# Altium PCB Sampler_4HP.PCBDOC (part 1 of 6)
Units mm, origin at the board's own origin, x right, y up, seen from the top; angles counter-clockwise.
Board outline 159.99 x 100 mm, 4 copper layers (Top, GP1(GND), L3, Bot), stack 1.648 mm thick; 546 components, 321 nets, 1657 pads, 795 vias.
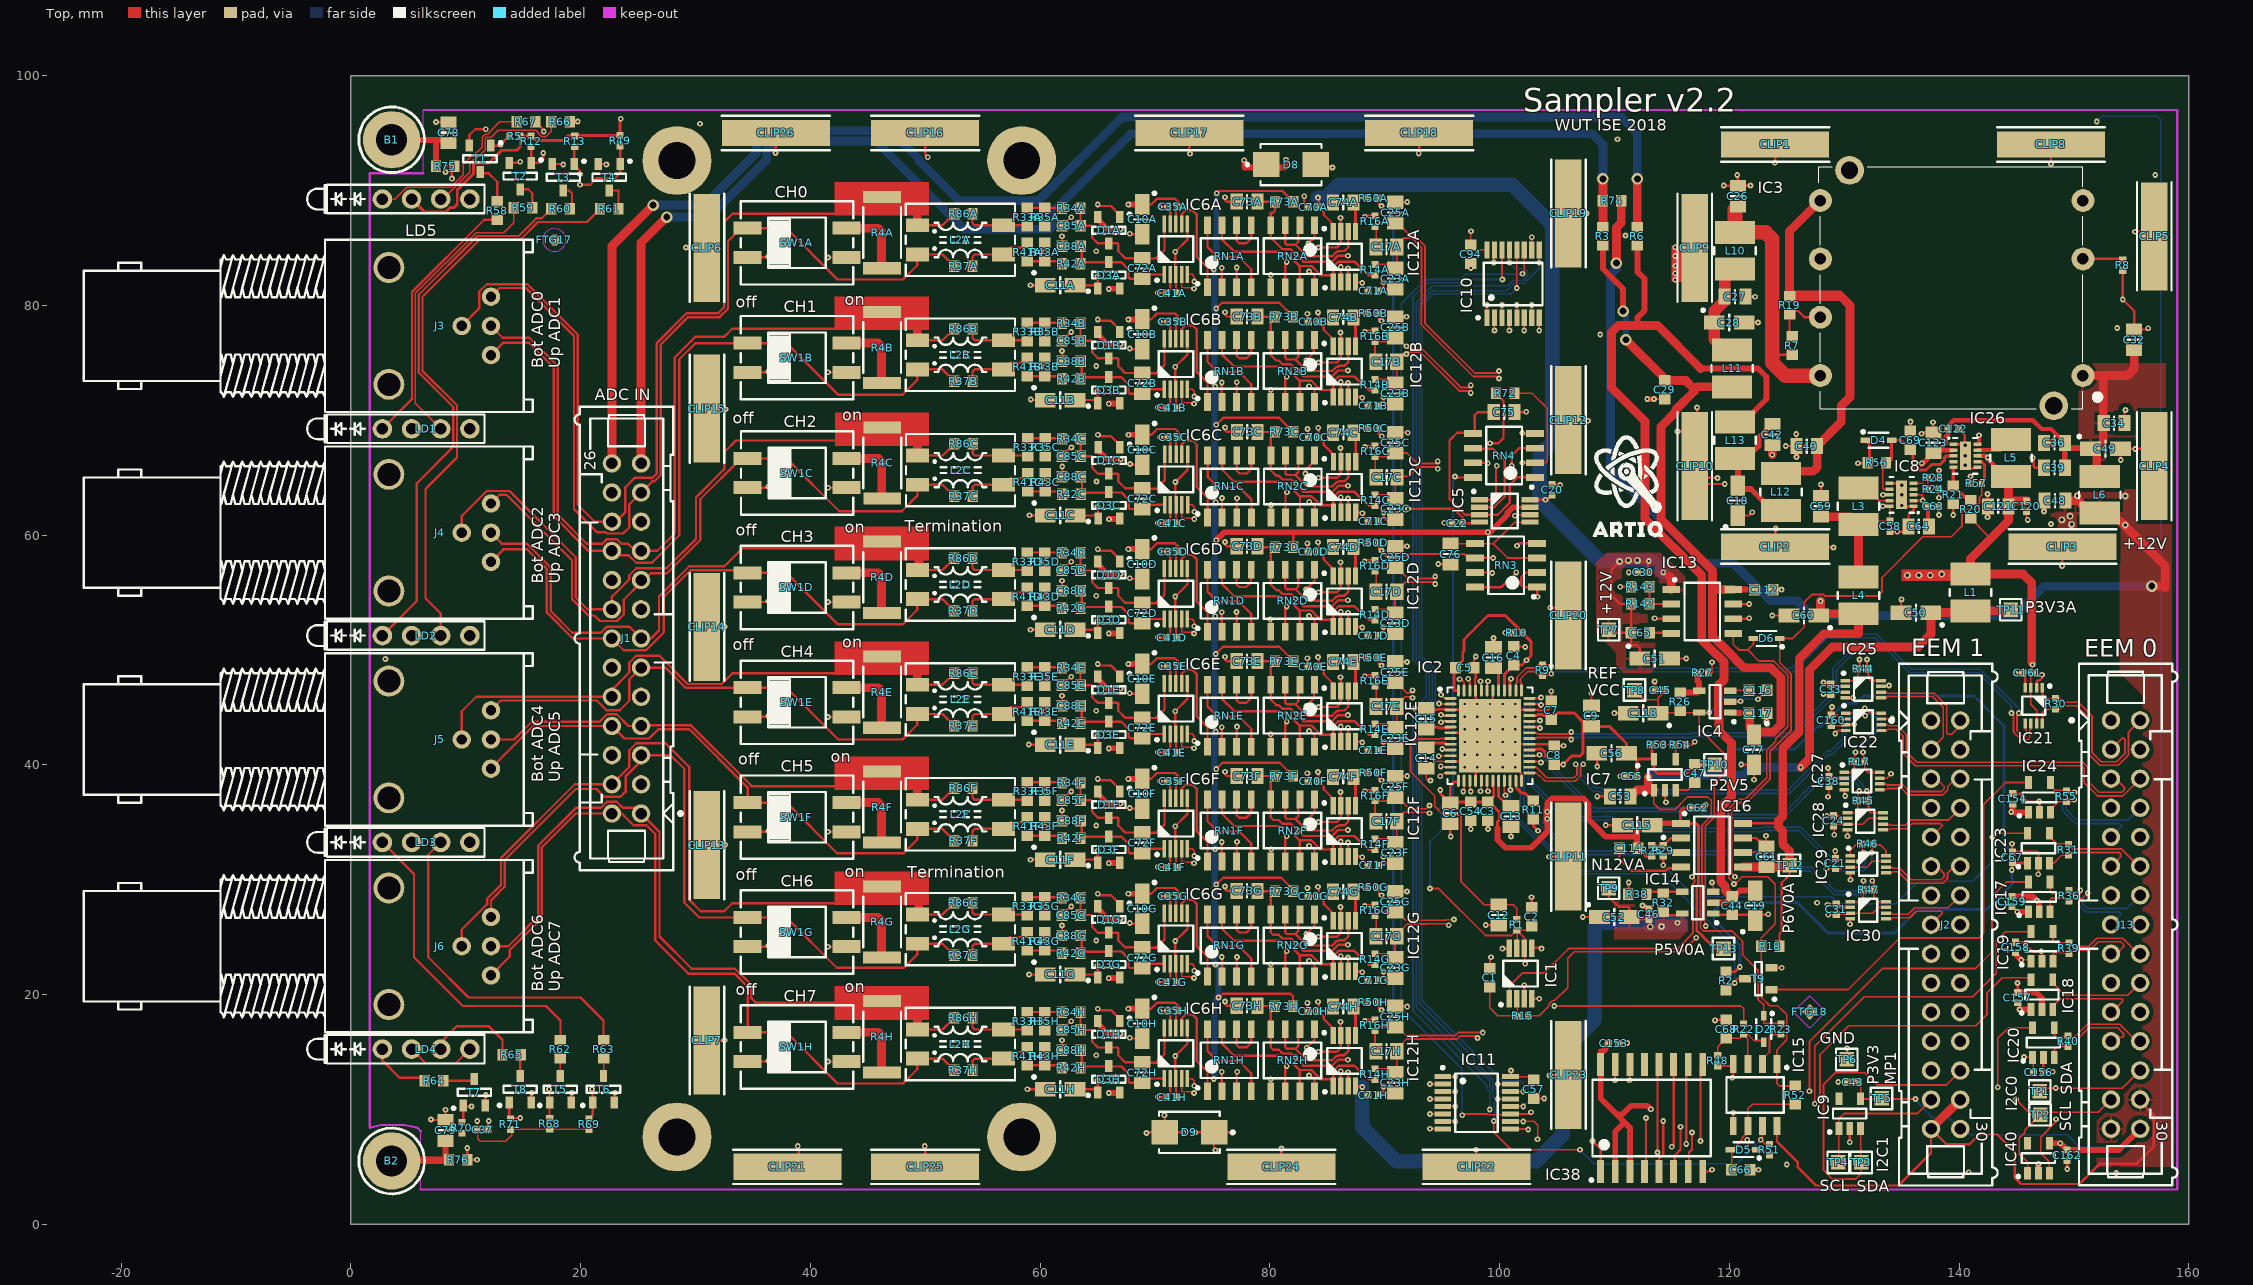
[diagram p0: Top view]
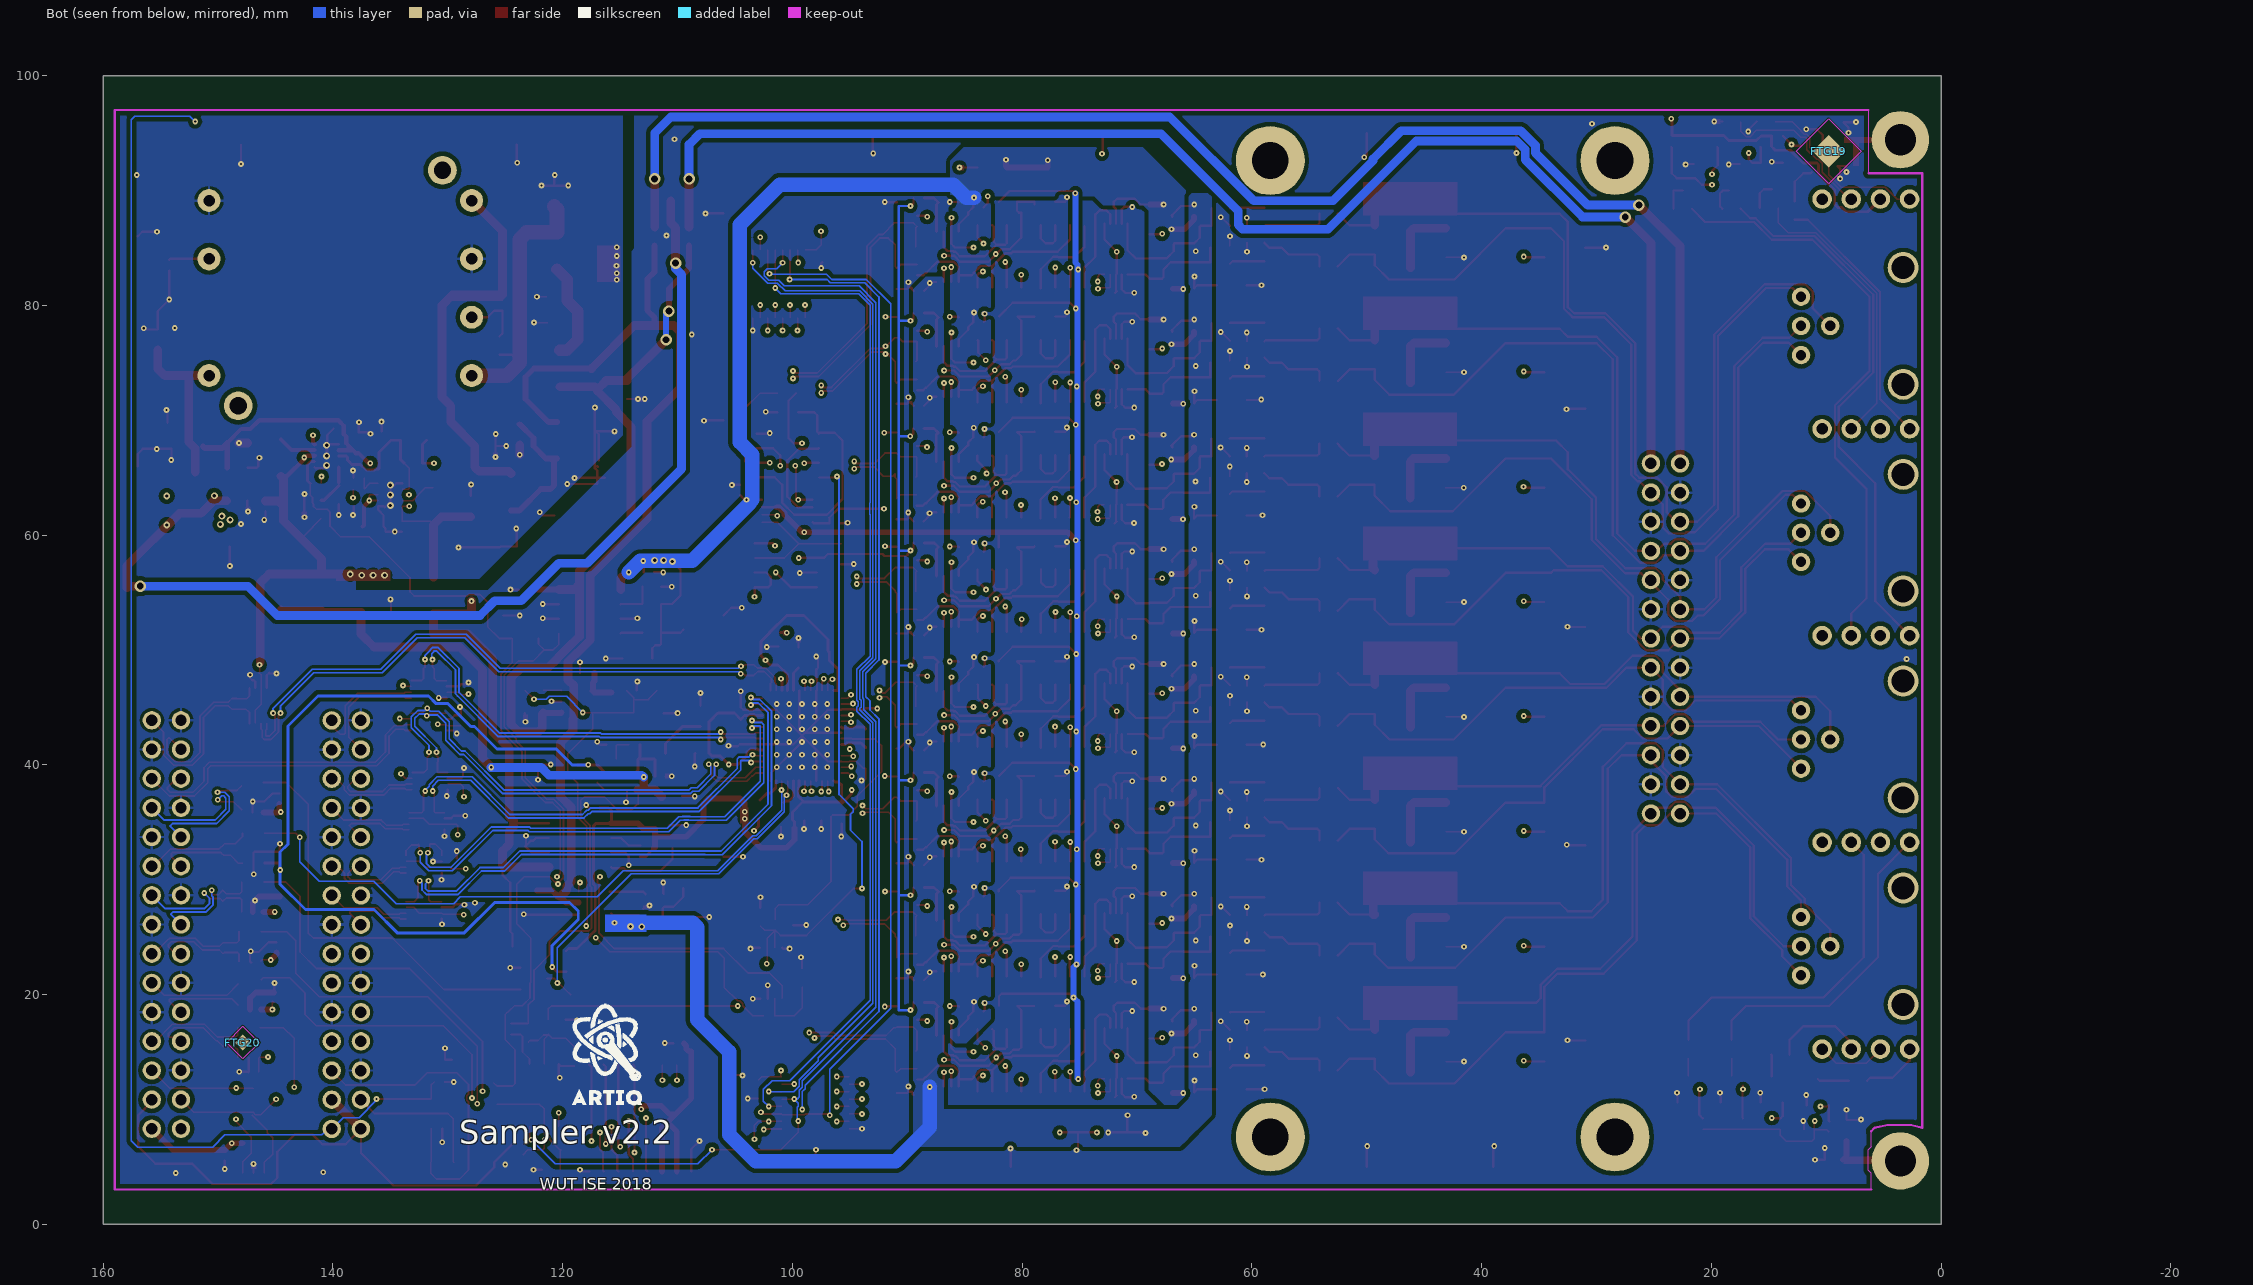
[diagram p1: Bot view, seen from below]
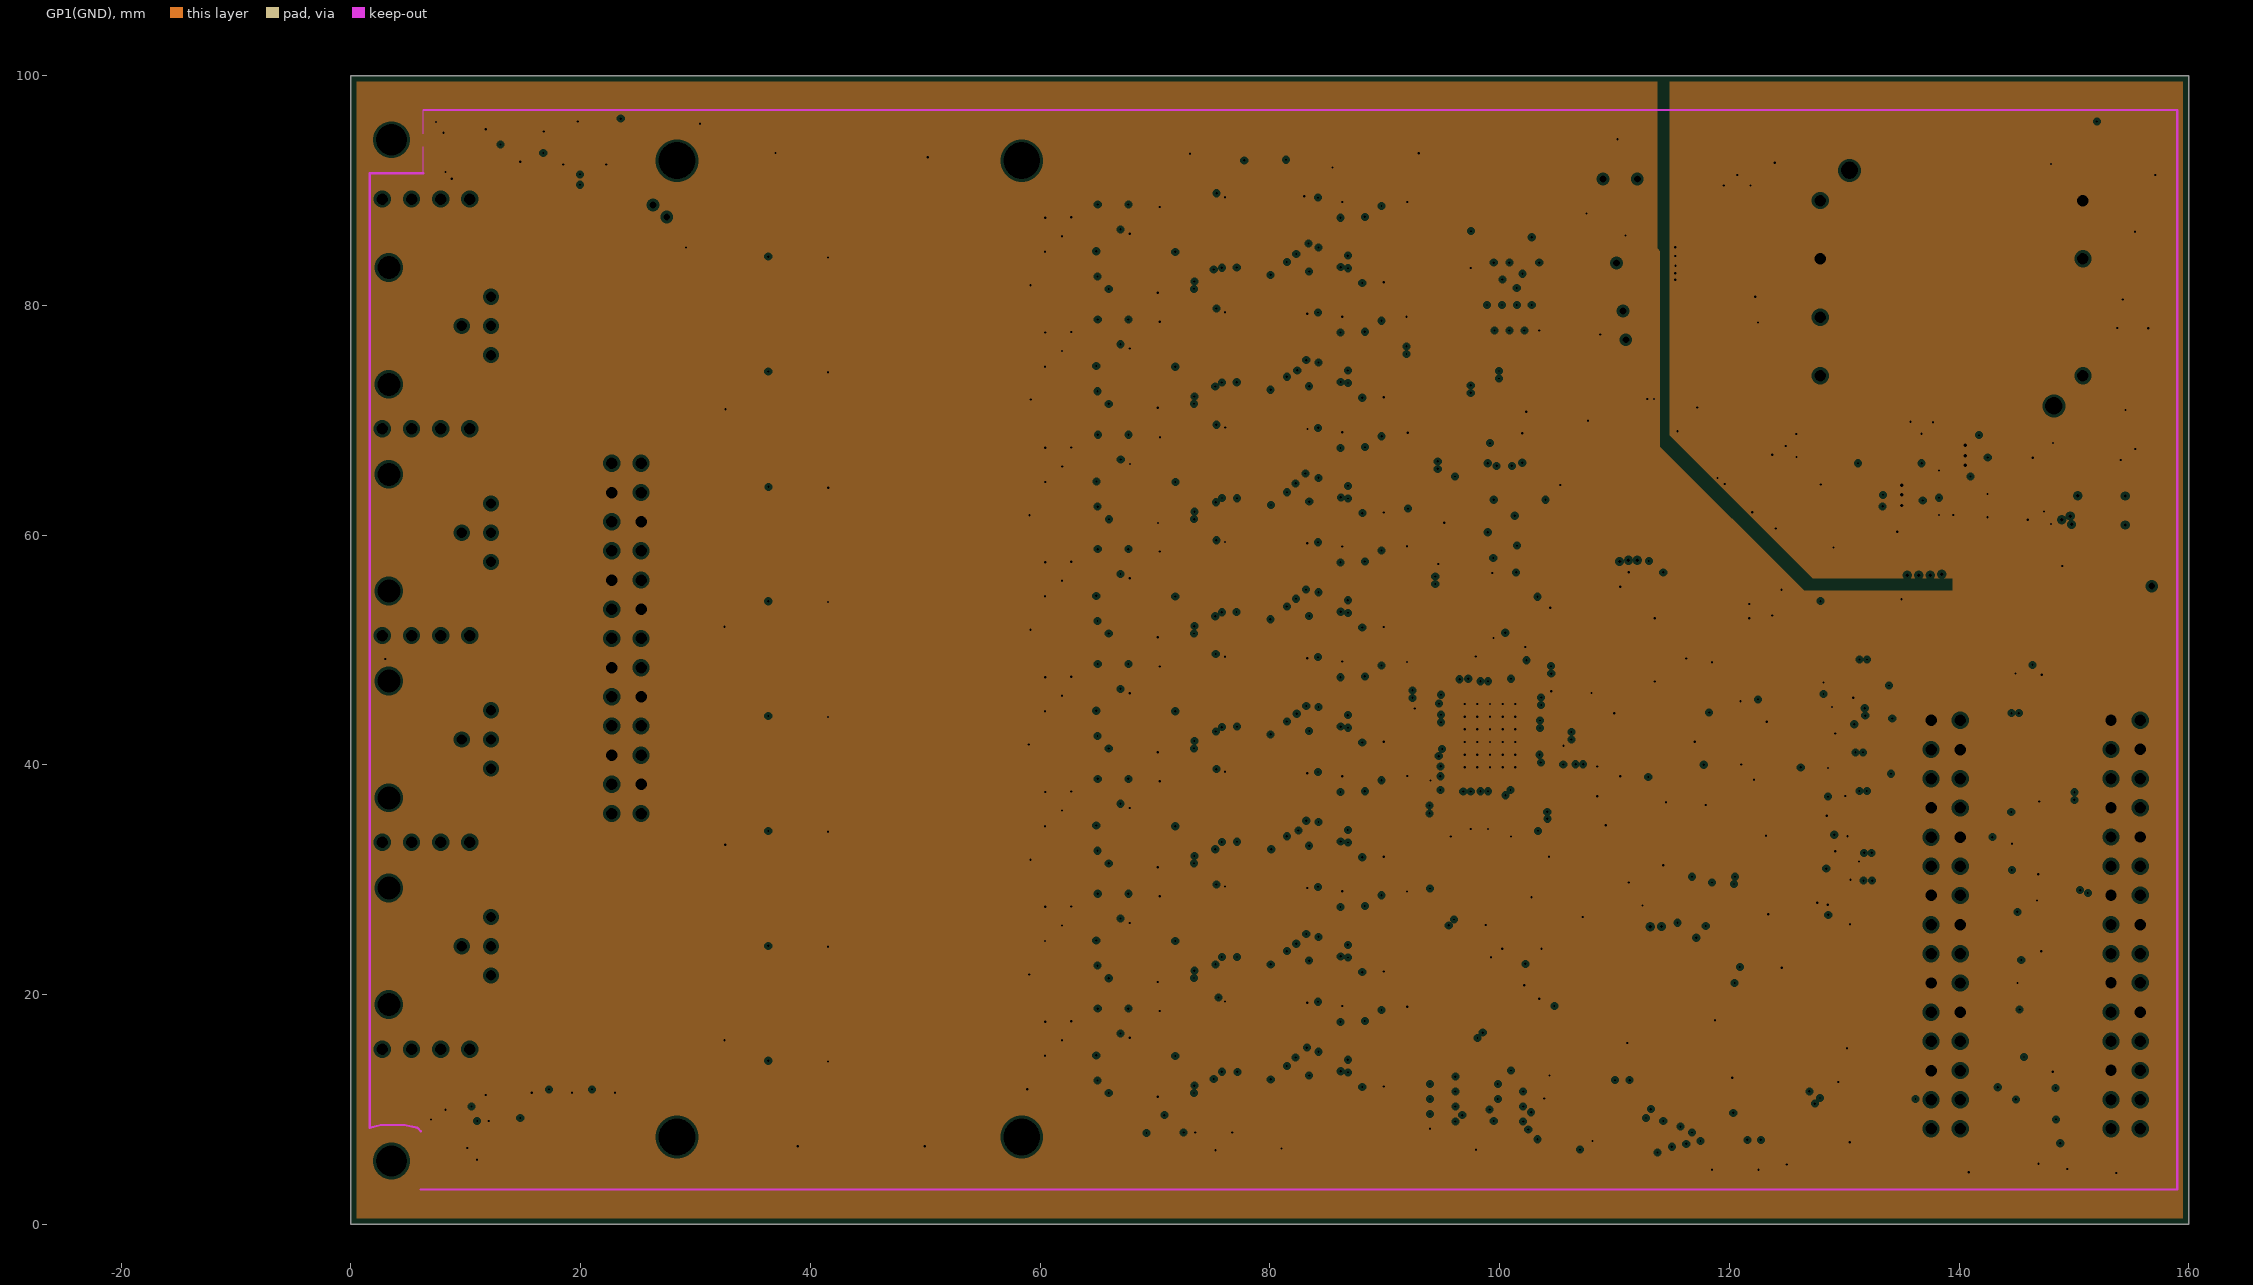
[diagram p2: GP1(GND), clearances drawn from the general rule]
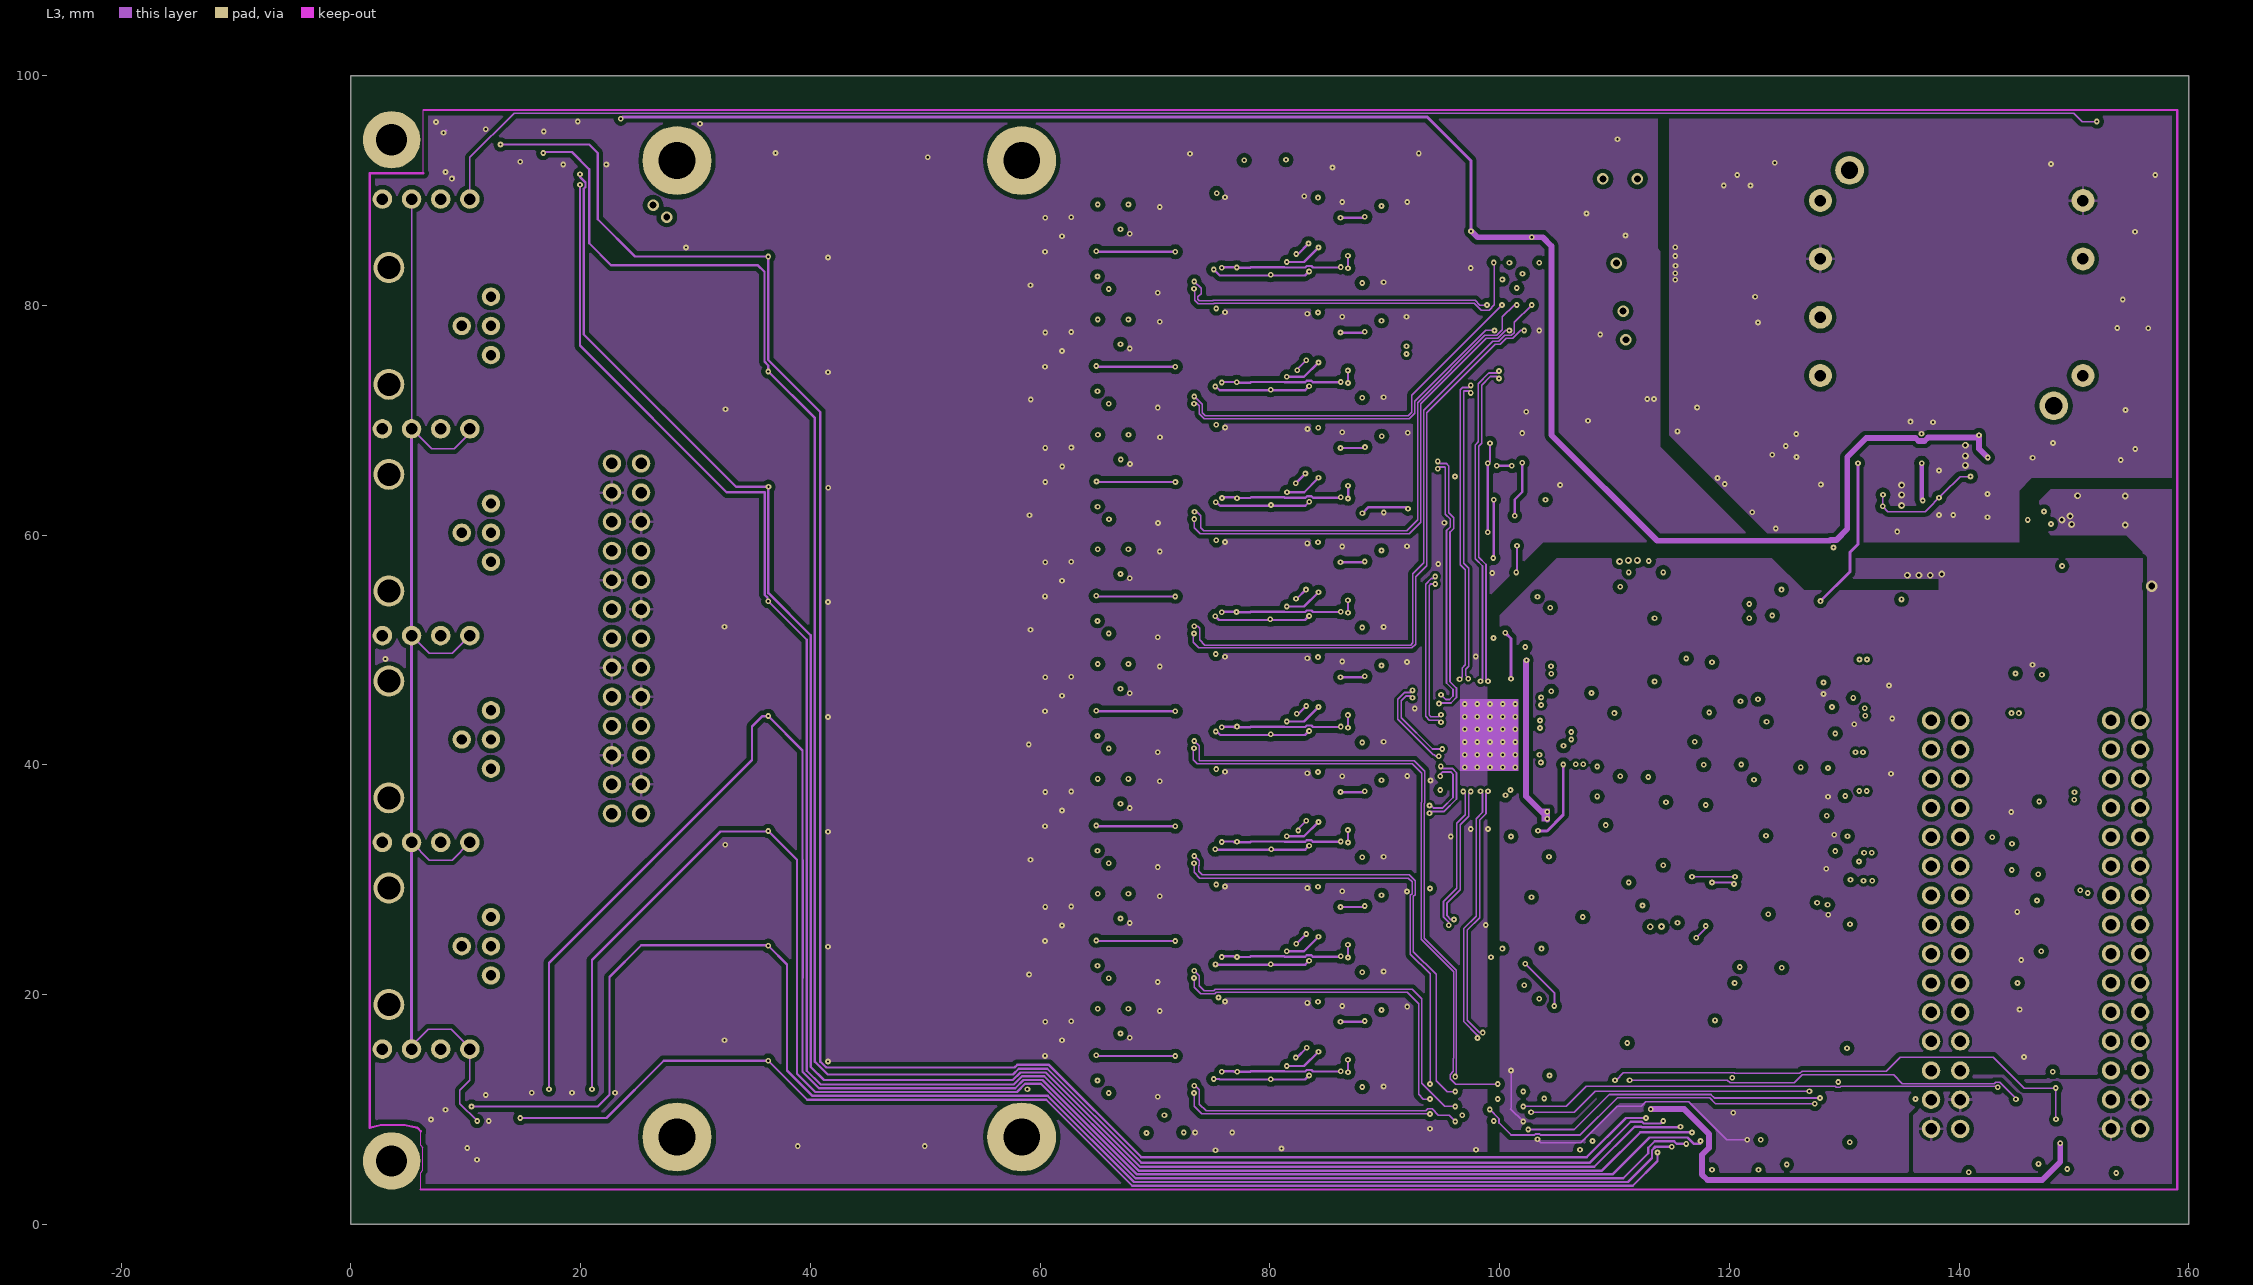
[diagram p3: L3]
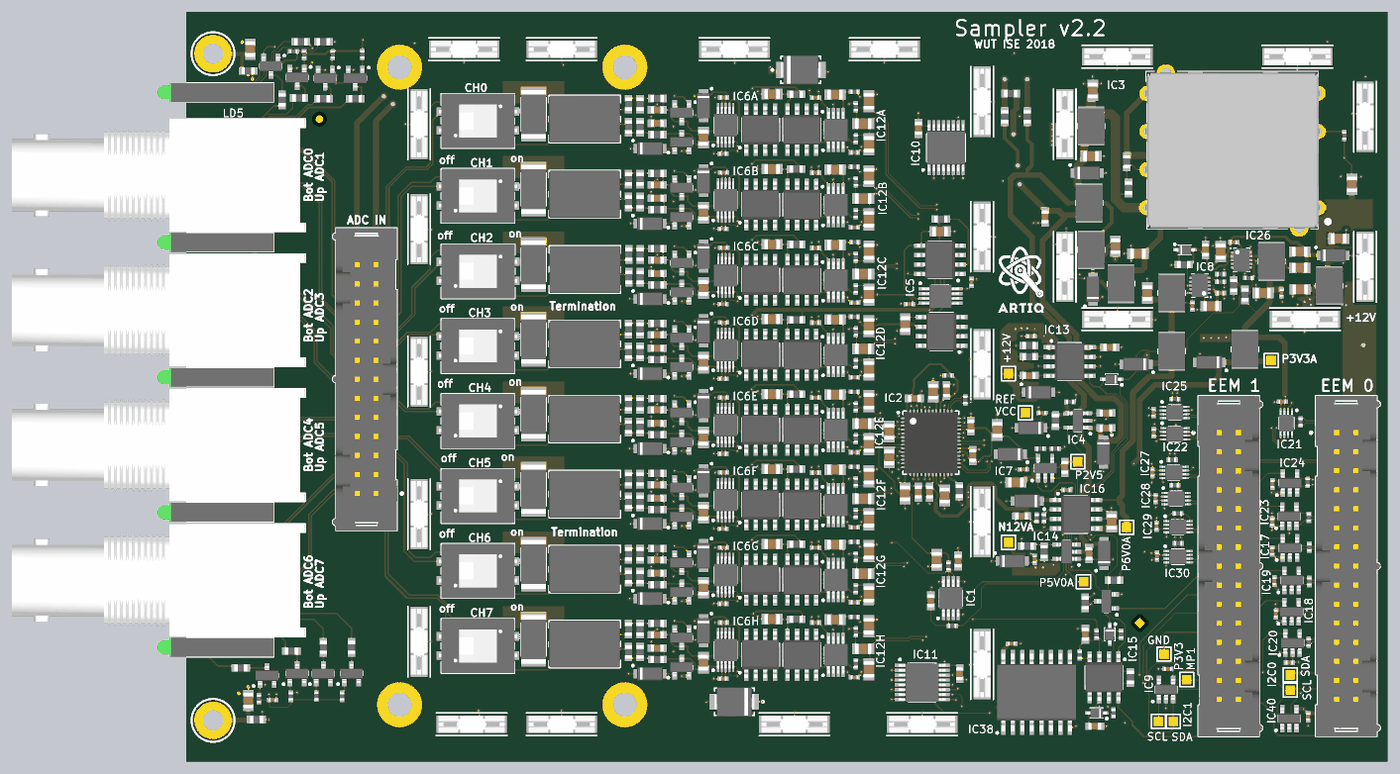
[diagram p8: 3D render of the assembled board from above, using the file's embedded part models]

## Layer stack, top to bottom
TopSolder: solder mask 0.0102, Solder Resist, Dk 3.5
Top: signal copper 0.058
Dielectric1: core 0.18, FR-4, Dk 4.8
GP1(GND): plane copper 0.036, net GND
Dielectric 3: prepreg 1.1, Dk 4.2
L3: signal copper 0.036
Dielectric2: core 0.18, FR-4, Dk 4.2
Bot: signal copper 0.058
BottomSolder: solder mask 0.0102, Solder Resist, Dk 3.5

## Board outline
0,0 159.995,0 159.995,100 0,100

## Design rules (kind name [scope] priority, off if disabled: settings)
AcuteAngle [All] p1: minimum=6.00000000000000E+0001 checktracksonly=FALSE
Clearance Clearance_DIFF [(InDifferentialPairClass('All Differential Pairs'))] p1: gap=0.127 ignorepadtopadclearanceinfootprint=FALSE except(0: Arc-Hole Track-Hole SMDPad-Hole THPad-Hole Via-Hole Fill-Hole Poly-Hole Region-Hole Text-Hole; 0.254: Arc-Poly Track-Poly SMDPad-Poly THPad-Poly Via-Poly Fill-Poly Poly-Poly Poly-Region Poly-Text)
Clearance [All] p2: gap=0.127 ignorepadtopadclearanceinfootprint=FALSE except(0: Arc-Hole Track-Hole SMDPad-Hole THPad-Hole Via-Hole Fill-Hole Poly-Hole Region-Hole Text-Hole; 0.381: Arc-Poly Track-Poly SMDPad-Poly THPad-Poly Via-Poly Fill-Poly Poly-Poly)
ComponentClearance [All] p1 off: gap=0.254 collisioncheckmode=3 verticalgap=0.254 showdistances=FALSE
DiffPairsRouting [All] p1: maxlimit=0.178 minlimit=0.152 mostfreqgap=0.152 toplayer_minwidth=0.127 toplayer_maxwidth=0.152 toplayer_prefwidth=0.152 midlayer1_minwidth=0.127 midlayer1_maxwidth=0.152 midlayer1_prefwidth=0.152 bottomlayer_minwidth=0.127 bottomlayer_maxwidth=0.152 bottomlayer_prefwidth=0.152 maxuncoupledlength=12.7
FabricationTestPointUsage TestPointUsage [All] p1: valid=0 allowmultiple=FALSE
FabricationTestpoint Testpoint [All] p1: side=3 testpointundercomponent=TRUE minsize=1.016 maxsize=2.54 preferedsize=1.524 minholesize=0.508 maxholesize=1.016 preferedholesize=0.813 testpointgrid=0.025 allowsidetop=TRUE allowsidebottom=TRUE usegrid=TRUE gridtolerance=0
Height [All] p1 off: minheight=0 maxheight=25.4 prefheight=12.7
HoleSize [All] p1: absolutevalues=TRUE maxlimit=3.81 minlimit=0.025 maxpercent=80.000 minpercent=20.000
HoleToHoleClearance [All] p1: gap=0.025 allowstackedmicrovias=TRUE
MinimumSolderMaskSliver [All] p1: minsoldermaskwidth=0
PlaneClearance [All] p1: clearance=0.254
PlaneConnect [All] p1: planeconnectstyle=Direct reliefexpansion=0.508 reliefentries=4 reliefconductorwidth=0.254 reliefairgap=0.254
PolygonConnect PolygonConnect_pad [(InPadClass('All Pads'))] p1: connectstyle=Relief reliefconductorwidth=0.254 reliefentries=4 polygonreliefangle="90 Angle" airgapwidth=0.254
PolygonConnect [All] p2: connectstyle=Direct reliefconductorwidth=0.254 reliefentries=4 polygonreliefangle="45 Angle" airgapwidth=0.254
RoomDefinition Sampler [InComponentClass('Sampler')] p1 off: confinementstyle=ConfineIn formatcopy=TRUE lockcomponents=FALSE outline -101.6,-152.4 -50.8,-152.4 -50.8,-127 -101.6,-127
RoomDefinition U_LVDS_EEM1 [InComponentClass('U_LVDS_EEM1')] p2 off: confinementstyle=ConfineIn formatcopy=TRUE lockcomponents=FALSE outline 143.25,0 160,0 160,54.5 143.25,54.5
RoomDefinition U_LVDS_EEM0 [InComponentClass('U_LVDS_EEM0')] p3 off: confinementstyle=ConfineIn formatcopy=TRUE lockcomponents=FALSE outline 143.25,54.6 123.5,54.6 123.5,0 143.25,0
RoomDefinition U_Input_channel1 [InComponentClass('U_Input_channel1')] p4 off: confinementstyle=ConfineIn formatcopy=TRUE lockcomponents=FALSE outline 26,80.5 92,80.5 92,90 26,90
RoomDefinition U_Input_channel2 [InComponentClass('U_Input_channel2')] p5 off: confinementstyle=ConfineIn formatcopy=TRUE lockcomponents=FALSE outline 26,70.5 92,70.5 92,80 26,80
RoomDefinition U_Input_channel3 [InComponentClass('U_Input_channel3')] p6 off: confinementstyle=ConfineIn formatcopy=TRUE lockcomponents=FALSE outline 26.013,60.456 92.013,60.456 92.013,69.956 26.013,69.956
RoomDefinition U_Input_channel4 [InComponentClass('U_Input_channel4')] p7 off: confinementstyle=ConfineIn formatcopy=TRUE lockcomponents=FALSE outline 26,50.5 92,50.5 92,60 26,60
RoomDefinition U_Input_channel6 [InComponentClass('U_Input_channel6')] p8 off: confinementstyle=ConfineIn formatcopy=TRUE lockcomponents=FALSE outline 26,30.5 92,30.5 92,40 26,40
RoomDefinition U_Input_channel8 [InComponentClass('U_Input_channel8')] p9 off: confinementstyle=ConfineIn formatcopy=TRUE lockcomponents=FALSE outline 26,10.5 92,10.5 92,20 26,20
RoomDefinition U_Supply [InComponentClass('U_Supply')] p10 off: confinementstyle=ConfineIn formatcopy=TRUE lockcomponents=FALSE outline 96.952,57.45 157.937,57.45 157.937,96.19 96.952,96.19
RoomDefinition U_Input_channel5 [InComponentClass('U_Input_channel5')] p11 off: confinementstyle=ConfineIn formatcopy=TRUE lockcomponents=FALSE outline 26,40.5 92,40.5 92,50 26,50
RoomDefinition U_ADC_8CH [InComponentClass('U_ADC_8CH')] p12 off: confinementstyle=ConfineIn formatcopy=TRUE lockcomponents=FALSE outline 77.336,35.306 94.64,35.306 94.64,64.232 77.336,64.232
RoomDefinition U_Input_channel7 [InComponentClass('U_Input_channel7')] p13 off: confinementstyle=ConfineIn formatcopy=TRUE lockcomponents=FALSE outline 26,20.5 92,20.5 92,30 26,30
RoutingVias [All] p1: holewidth=0.2 width=0.5 viastyle="Through Hole" minholewidth=0.2 minwidth=0.5 maxholewidth=0.711 maxwidth=1.27
SilkToSilkClearance [All] p1: silktosilkclearance=0
SilkToSolderMaskClearance SilkscreenOverComponentPads [IsPad] p1: minsilkscreentomaskgap=0 clearancetoexposedcopper=TRUE
SolderMaskExpansion [All] p1: expansion=0.051 istentingtop=FALSE
Width [All] p1: maxlimit=1.27 minlimit=0.127 preferedwidth=0.127
18 further rules are at their usual default settings.

## Classes and differential pairs
component class U_LVDS_EEM1: C21 C24 C31 C33 C37 C38 C43 IC9 IC25 IC27 IC28 IC29 IC30 J2 R17 R44 R45 R46 R47 TP3 TP4 TP5 TP6
net class TERM_STAT[7..0]: TERM_STAT0 TERM_STAT1 TERM_STAT2 TERM_STAT3 TERM_STAT4 TERM_STAT5 TERM_STAT6 TERM_STAT7
channel class Input_channel: U_Input_channel1 U_Input_channel2 U_Input_channel3 U_Input_channel4 U_Input_channel5 U_Input_channel6 U_Input_channel7 U_Input_channel8
component class U_Supply: C18 C19 C26 C27 C28 C29 C30 C32 C34 C36 C39 C40 C42 C44 C45 C46 C47 C48 C49 C50 C51 C52 C53 C55 C56 C58 C59 C60 C61 C62 C63 C64 C65 C66 C68 C69 C77 C112 C114 C115 C116 C117 C118 C120 C121 C122 C123 D2 D4 D5 D6 D8 D9 IC3 IC4 IC7 IC8 IC13 IC14 IC15 IC16 IC26 L1 L3 L4 L5 L6 L10 L11 L12 L13 R7 R8 R18 R19 R20 R21 R22 R23 R24 R25 R26 R27 R28 R29 R32 R38 R48 R51 R52 R53 R54 R56 R57 R142 R143 TP7 TP8 TP9 TP10 TP11 TP12 TP13
component class U_Input_channel8: C10H C11H C17H C23H C25H C35H C41H C70H C71H C72H C73H C74H C85H C88H D1H D3H IC6H IC12H L2H R4H R14H R16H R33H R34H R35H R37H R41H R42H R43H R50H R73H R86H RN1H RN2H SW1H
component class U_Input_channel7: C10G C11G C17G C23G C25G C35G C41G C70G C71G C72G C73G C74G C85G C88G D1G D3G IC6G IC12G L2G R4G R14G R16G R33G R34G R35G R37G R41G R42G R43G R50G R73G R86G RN1G RN2G SW1G
component class U_Input_channel6: C10F C11F C17F C23F C25F C35F C41F C70F C71F C72F C73F C74F C85F C88F D1F D3F IC6F IC12F L2F R4F R14F R16F R33F R34F R35F R37F R41F R42F R43F R50F R73F R86F RN1F RN2F SW1F
component class U_Input_channel5: C10E C11E C17E C23E C25E C35E C41E C70E C71E C72E C73E C74E C85E C88E D1E D3E IC6E IC12E L2E R4E R14E R16E R33E R34E R35E R37E R41E R42E R43E R50E R73E R86E RN1E RN2E SW1E
component class U_Input_channel4: C10D C11D C17D C23D C25D C35D C41D C70D C71D C72D C73D C74D C85D C88D D1D D3D IC6D IC12D L2D R4D R14D R16D R33D R34D R35D R37D R41D R42D R43D R50D R73D R86D RN1D RN2D SW1D
component class U_Input_channel3: C10C C11C C17C C23C C25C C35C C41C C70C C71C C72C C73C C74C C85C C88C D1C D3C IC6C IC12C L2C R4C R14C R16C R33C R34C R35C R37C R41C R42C R43C R50C R73C R86C RN1C RN2C SW1C
component class U_Input_channel2: C10B C11B C17B C23B C25B C35B C41B C70B C71B C72B C73B C74B C85B C88B D1B D3B IC6B IC12B L2B R4B R14B R16B R33B R34B R35B R37B R41B R42B R43B R50B R73B R86B RN1B RN2B SW1B
component class U_Input_channel1: C10A C11A C17A C23A C25A C35A C41A C70A C71A C72A C73A C74A C85A C88A D1A D3A IC6A IC12A L2A R4A R14A R16A R33A R34A R35A R37A R41A R42A R43A R50A R73A R86A RN1A RN2A SW1A
component class U_ADC_8CH: C1 C2 C3 C4 C5 C6 C7 C8 C9 C12 C13 C14 C15 C16 C20 C22 C54 C75 C76 IC1 IC2 IC5 R1 R2 R9 R10 R11 R15 R72 RN3 RN4 T9
component class Sampler: B1 B2 C57 C78 C79 C94 CLIP1 CLIP2 CLIP3 CLIP4 CLIP5 CLIP6 CLIP7 CLIP8 CLIP9 CLIP10 CLIP11 CLIP12 CLIP13 CLIP14 CLIP15 CLIP16 CLIP17 CLIP18 CLIP19 CLIP20 CLIP21 CLIP22 CLIP23 CLIP24 CLIP25 CLIP26 FTG17 FTG18 FTG19 FTG20 IC10 IC11 J1 J3 J4 J5 J6 LD1 LD2 LD3 LD4 LD5 R3 R5 R6 R12 R13 R49 R58 R59 R60 R61 R62 R63 R64 R65 R66 R67 R68 R69 R70 R71 R74 R75 R76 T1 T2 T3 T4 T5 T6 T7 T8
component class U_LVDS_EEM0: C67 C153 C154 C156 C157 C158 C159 C160 C161 C162 IC17 IC18 IC19 IC20 IC21 IC22 IC23 IC24 IC38 IC40 J13 R30 R31 R36 R39 R40 R55 TP1 TP2
differential pair EEM1_7: +EEM1_7_P -EEM1_7_N
differential pair EEM1_6: +EEM1_6_P -EEM1_6_N
differential pair EEM1_5: +EEM1_5_P -EEM1_5_N
differential pair EEM1_4: +EEM1_4_P -EEM1_4_N
differential pair EEM1_3: +EEM1_3_P -EEM1_3_N
differential pair EEM1_2: +EEM1_2_P -EEM1_2_N
differential pair EEM1_1: +EEM1_1_P -EEM1_1_N
differential pair EEM1_0: +EEM1_0_P -EEM1_0_N
differential pair EEM0_7: +EEM0_7_P -EEM0_7_N
differential pair EEM0_6: +EEM0_6_P -EEM0_6_N
differential pair EEM0_5: +EEM0_5_P -EEM0_5_N
differential pair EEM0_4: +EEM0_4_P -EEM0_4_N
differential pair EEM0_3: +EEM0_3_P -EEM0_3_N
differential pair EEM0_2: +EEM0_2_P -EEM0_2_N
differential pair EEM0_1: +EEM0_1_P -EEM0_1_N
differential pair EEM0_0: +EEM0_0_P -EEM0_0_N
differential pair ADC_CLKOUT: +ADC_CLKOUT_P -ADC_CLKOUT_N
differential pair ADC_SCK: +ADC_SCK_P -ADC_SCK_N
differential pair ADC_SDOA: +ADC_SDOA_P -ADC_SDOA_N
differential pair ADC_SDOB: +ADC_SDOB_P -ADC_SDOB_N
differential pair ADC_SDOC: +ADC_SDOC_P -ADC_SDOC_N
differential pair ADC_SDOD: +ADC_SDOD_P -ADC_SDOD_N
differential pair IN_0: +IN_0_P -IN_0_N
differential pair IN_1: +IN_1_P -IN_1_N
differential pair IN_2: +IN_2_P -IN_2_N
differential pair IN_3: +IN_3_P -IN_3_N
differential pair IN_4: +IN_4_P -IN_4_N
differential pair IN_5: +IN_5_P -IN_5_N
differential pair IN_6: +IN_6_P -IN_6_N
differential pair IN_7: +IN_7_P -IN_7_N

## Components (designator, comment, footprint, x,y, rotation, side; value= is the part's Value field where it differs from the comment)
B1 "Plated Hole" MTG270_500 3.556,94.412 r0 top
B2 "Plated Hole" MTG270_500 3.556,5.512 r0 top
C1 "1uF" CAPC1608X87N 99.168,21.461 r270 top
C2 "2.2uF" CAPC1608X87N 102.8,26.769 r270 top
C3 "100nF" CAPC1608X87N 98.988,35.955 r90 top
C4 "100nF" CAPC1608X87N 101.25,49.5 r270 top
C5 "100nF" CAPC1608X87N 96.975,48.45 r180 top
C6 "10uF" CAPC2012X95N 95.711,35.777 r90 top
C7 "100nF" CAPC1608X87N 104.5,44.75 r270 top
C8 "100nF" CAPC1608X87N 104.75,40.825 r270 top
C9 "10uF" CAPC2012X95N 108,44.25 r270 top
C10A "10uF" CAPMP3216X180N 68.885,87.478 r270 top (schematic designator C10)
C10B "10uF" CAPMP3216X180N 68.885,77.478 r270 top (schematic designator C10)
C10C "10uF" CAPMP3216X180N 68.897,67.434 r270 top (schematic designator C10)
C10D "10uF" CAPMP3216X180N 68.885,57.478 r270 top (schematic designator C10)
C10E "10uF" CAPMP3216X180N 68.885,47.478 r270 top (schematic designator C10)
C10F "10uF" CAPMP3216X180N 68.885,37.478 r270 top (schematic designator C10)
C10G "10uF" CAPMP3216X180N 68.885,27.478 r270 top (schematic designator C10)
C10H "10uF" CAPMP3216X180N 68.885,17.478 r270 top (schematic designator C10)
C11A "10uF" CAPMP3216X180N 61.75,81.75 r0 top (schematic designator C11)
C11B "10uF" CAPMP3216X180N 61.75,71.75 r0 top (schematic designator C11)
C11C "10uF" CAPMP3216X180N 61.763,61.706 r0 top (schematic designator C11)
C11D "10uF" CAPMP3216X180N 61.75,51.75 r0 top (schematic designator C11)
C11E "10uF" CAPMP3216X180N 61.75,41.75 r0 top (schematic designator C11)
C11F "10uF" CAPMP3216X180N 61.75,31.75 r0 top (schematic designator C11)
C11G "10uF" CAPMP3216X180N 61.75,21.75 r0 top (schematic designator C11)
C11H "10uF" CAPMP3216X180N 61.75,11.75 r0 top (schematic designator C11)
C12 "10uF" CAPC2012X95N 99.93,26.922 r90 top
C13 "10uF" CAPC2012X95N 101,35.5 r90 top
C14 "10uF" CAPC2012X95N 93.625,40.586 r90 top
C15 "10uF" CAPC2012X95N 93.625,44.015 r270 top
C16 "10uF" CAPC2012X95N 99.471,49.341 r270 top
C17A "2.2nF" CAPC2013X100N 90.159,85.076 r0 top (schematic designator C17)
C17B "2.2nF" CAPC2013X100N 90.159,75.076 r0 top (schematic designator C17)
C17C "2.2nF" CAPC2013X100N 90.172,65.032 r0 top (schematic designator C17)
C17D "2.2nF" CAPC2013X100N 90.159,55.076 r0 top (schematic designator C17)
C17E "2.2nF" CAPC2013X100N 90.159,45.076 r0 top (schematic designator C17)
C17F "2.2nF" CAPC2013X100N 90.159,35.076 r0 top (schematic designator C17)
C17G "2.2nF" CAPC2013X100N 90.159,25.076 r0 top (schematic designator C17)
C17H "2.2nF" CAPC2013X100N 90.159,15.076 r0 top (schematic designator C17)
C18 "10uF" CAPMP3216X180N 120.75,63 r90 top
C19 "10uF" CAPMP3216X180N 122.25,27.75 r90 top
C20 "100nF" CAPC1005X55N 104.575,63.925 r270 top
C21 "100nF" CAPC1005X55N 129.232,31.408 r270 top
C22 "100nF" CAPC1005X55N 96.325,61.025 r0 top
C23A "2.2nF" CAPC2013X100N 90.909,82.326 r90 top (schematic designator C23)
C23B "2.2nF" CAPC2013X100N 90.909,72.326 r90 top (schematic designator C23)
C23C "2.2nF" CAPC2013X100N 90.922,62.282 r90 top (schematic designator C23)
C23D "2.2nF" CAPC2013X100N 90.909,52.326 r90 top (schematic designator C23)
C23E "2.2nF" CAPC2013X100N 90.909,42.326 r90 top (schematic designator C23)
C23F "2.2nF" CAPC2013X100N 90.909,32.326 r90 top (schematic designator C23)
C23G "2.2nF" CAPC2013X100N 90.909,22.326 r90 top (schematic designator C23)
C23H "2.2nF" CAPC2013X100N 90.909,12.326 r90 top (schematic designator C23)
C24 "100nF" CAPC1005X55N 129.084,35.119 r270 top
C25A "2.2nF" CAPC2013X100N 90.909,88.076 r90 top (schematic designator C25)
C25B "2.2nF" CAPC2013X100N 90.909,78.076 r90 top (schematic designator C25)
C25C "2.2nF" CAPC2013X100N 90.922,68.032 r90 top (schematic designator C25)
C25D "2.2nF" CAPC2013X100N 90.909,58.076 r90 top (schematic designator C25)
C25E "2.2nF" CAPC2013X100N 90.909,48.076 r90 top (schematic designator C25)
C25F "2.2nF" CAPC2013X100N 90.909,38.076 r90 top (schematic designator C25)
C25G "2.2nF" CAPC2013X100N 90.909,28.076 r90 top (schematic designator C25)
C25H "2.2nF" CAPC2013X100N 90.909,18.076 r90 top (schematic designator C25)
C26 "22uF" CAPC2012X135N 120.75,89.5 r270 top
C27 "22uF" CAPC2012X135N 120.5,80.75 r180 top
C28 "10uF" CAPMP3216X180N 120,78.5 r0 top
C29 "1uF" CAPC1608X87N 114.375,72.65 r90 top
C30 "100nF" CAPC1005X55N 112.5,56.75 r0 top
C31 "100nF" CAPC1005X55N 129.308,27.419 r270 top
C32 "22uF" CAPC2012X135N 155.25,77 r270 top
C33 "100nF" CAPC1005X55N 128.837,46.561 r270 top
C34 "22uF" CAPC2012X135N 153.5,69.75 r180 top
C35A "100nF" CAPC1005X55N 71.571,88.568 r0 top (schematic designator C35)
C35B "100nF" CAPC1005X55N 71.571,78.568 r0 top (schematic designator C35)
C35C "100nF" CAPC1005X55N 71.584,68.524 r0 top (schematic designator C35)
C35D "100nF" CAPC1005X55N 71.571,58.568 r0 top (schematic designator C35)
C35E "100nF" CAPC1005X55N 71.571,48.568 r0 top (schematic designator C35)
C35F "100nF" CAPC1005X55N 71.571,38.568 r0 top (schematic designator C35)
C35G "100nF" CAPC1005X55N 71.571,28.568 r0 top (schematic designator C35)
C35H "100nF" CAPC1005X55N 71.571,18.568 r0 top (schematic designator C35)
C36 "22uF" CAPC2012X135N 148.309,68.021 r0 top
C37 "100nF" CAPC1005X55N 11.5,8.25 r180 top
C38 "100nF" CAPC1005X55N 128.677,38.547 r270 top
C39 "22uF" CAPC2012X135N 148.309,65.862 r0 top
C40 "22uF" CAPC2012X135N 126.75,67.75 r0 top
C41A "100nF" CAPC1005X55N 71.471,81.068 r0 top (schematic designator C41)
C41B "100nF" CAPC1005X55N 71.471,71.068 r0 top (schematic designator C41)
C41C "100nF" CAPC1005X55N 71.484,61.024 r0 top (schematic designator C41)
C41D "100nF" CAPC1005X55N 71.471,51.068 r0 top (schematic designator C41)
C41E "100nF" CAPC1005X55N 71.471,41.068 r0 top (schematic designator C41)
C41F "100nF" CAPC1005X55N 71.471,31.068 r0 top (schematic designator C41)
C41G "100nF" CAPC1005X55N 71.471,21.068 r0 top (schematic designator C41)
C41H "100nF" CAPC1005X55N 71.471,11.068 r0 top (schematic designator C41)
C42 "22uF" CAPC2012X135N 123.75,68.75 r90 top
C43 "100nF" CAPC1005X55N 130.736,12.386 r0 top
C44 "1uF" CAPC1608X87N 120.25,27.75 r90 top
C45 "100nF" CAPC1005X55N 114,46.5 r0 top
C46 "100nF" CAPC1005X55N 113,27 r270 top
C47 "10nF" CAPC1608X87N 117,39.25 r90 top
C48 "22uF" CAPC2012X135N 148.36,62.992 r0 top
C49 "10uF" CAPMP3216X180N 152.75,67.5 r0 top
C50 "10uF" CAPMP3216X180N 136.25,53.25 r180 top
C51 "10uF" CAPMP3216X180N 113.5,49.25 r0 top
C52 "10uF" CAPMP3216X180N 110,26.75 r0 top
C53 "22uF" CAPC2012X135N 110.5,37.25 r0 top
C54 "100nF" CAPC1608X87N 97.489,35.955 r90 top
C55 "100nF" CAPC1005X55N 111.5,39 r0 top
C56 "10uF" CAPMP3216X180N 109.75,41 r180 top
C57 "100nF" CAPC1608X87N 103,11.75 r90 top
C58 "100nF" CAPC1005X55N 134,60.75 r90 top
C59 "22uF" CAPC2012X135N 128,62.5 r270 top
C60 "10uF" CAPMP3216X180N 126.5,53 r180 top
C61 "22uF" CAPC2012X135N 123.25,32 r270 top
C62 "100nF" CAPC1005X55N 117.25,36.25 r180 top
C63 "100nF" CAPC1005X55N 137.75,62.5 r180 top
C64 "22uF" CAPC2012X135N 136.5,60.75 r0 top
C65 "10nF" CAPC1608X87N 112.25,51.5 r180 top
C66 "1uF" CAPC1608X87N 121,4.75 r180 top
C67 "100nF" CAPC1005X55N 144.642,31.972 r270 top
C68 "1uF" CAPC1608X87N 119.75,17 r270 top
C69 "1uF" CAPC1608X87N 135.75,68.25 r270 top
C70A "100nF" CAPC1005X55N 83.8,88.55 r0 top (schematic designator C70)
C70B "100nF" CAPC1005X55N 83.8,78.55 r0 top (schematic designator C70)
C70C "100nF" CAPC1005X55N 83.813,68.506 r0 top (schematic designator C70)
C70D "100nF" CAPC1005X55N 83.8,58.55 r0 top (schematic designator C70)
C70E "100nF" CAPC1005X55N 83.8,48.55 r0 top (schematic designator C70)
C70F "100nF" CAPC1005X55N 83.8,38.55 r0 top (schematic designator C70)
C70G "100nF" CAPC1005X55N 83.8,28.55 r0 top (schematic designator C70)
C70H "100nF" CAPC1005X55N 83.8,18.55 r0 top (schematic designator C70)
C71A "100nF" CAPC1005X55N 89,81.25 r180 top (schematic designator C71)
C71B "100nF" CAPC1005X55N 89,71.25 r180 top (schematic designator C71)
C71C "100nF" CAPC1005X55N 89.013,61.206 r180 top (schematic designator C71)
C71D "100nF" CAPC1005X55N 89,51.25 r180 top (schematic designator C71)
C71E "100nF" CAPC1005X55N 89,41.25 r180 top (schematic designator C71)
C71F "100nF" CAPC1005X55N 89,31.25 r180 top (schematic designator C71)
C71G "100nF" CAPC1005X55N 89,21.25 r180 top (schematic designator C71)
C71H "100nF" CAPC1005X55N 89,11.25 r180 top (schematic designator C71)
C72A "82pF" CAPC2012X90N 68.885,83.21 r90 top (schematic designator C72)
C72B "82pF" CAPC2012X90N 68.885,73.21 r90 top (schematic designator C72)
C72C "82pF" CAPC2012X90N 68.897,63.167 r90 top (schematic designator C72)
C72D "82pF" CAPC2012X90N 68.885,53.21 r90 top (schematic designator C72)
C72E "82pF" CAPC2012X90N 68.885,43.21 r90 top (schematic designator C72)
C72F "82pF" CAPC2012X90N 68.885,33.21 r90 top (schematic designator C72)
C72G "82pF" CAPC2012X90N 68.885,23.21 r90 top (schematic designator C72)
C72H "82pF" CAPC2012X90N 68.885,13.21 r90 top (schematic designator C72)
C73A "47nF" CAPC2012X135N 78.025,89.025 r0 top (schematic designator C73)
C73B "47nF" CAPC2012X135N 78.025,79.025 r0 top (schematic designator C73)
C73C "47nF" CAPC2012X135N 78.038,68.981 r0 top (schematic designator C73)
C73D "47nF" CAPC2012X135N 78.025,59.025 r0 top (schematic designator C73)
C73E "47nF" CAPC2012X135N 78.025,49.025 r0 top (schematic designator C73)
C73F "47nF" CAPC2012X135N 78.025,39.025 r0 top (schematic designator C73)
C73G "47nF" CAPC2012X135N 78.025,29.025 r0 top (schematic designator C73)
C73H "47nF" CAPC2012X135N 78.025,19.025 r0 top (schematic designator C73)
C74A "47nF" CAPC2012X135N 86.4,88.95 r0 top (schematic designator C74)
C74B "47nF" CAPC2012X135N 86.4,78.95 r0 top (schematic designator C74)
C74C "47nF" CAPC2012X135N 86.413,68.906 r0 top (schematic designator C74)
C74D "47nF" CAPC2012X135N 86.4,58.95 r0 top (schematic designator C74)
C74E "47nF" CAPC2012X135N 86.4,48.95 r0 top (schematic designator C74)
C74F "47nF" CAPC2012X135N 86.4,38.95 r0 top (schematic designator C74)
C74G "47nF" CAPC2012X135N 86.4,28.95 r0 top (schematic designator C74)
C74H "47nF" CAPC2012X135N 86.4,18.95 r0 top (schematic designator C74)
C75 "47nF" CAPC2012X135N 100.4,70.7 r180 top
C76 "47nF" CAPC2012X135N 95.75,58.35 r90 top
C77 "10uF" CAPMP3216X180N 122.15,41.3 r270 top
C78 "Undefined" CAPC2012X135N 8.509,95.025 r90 top
C79 "Undefined" CAPC2012X135N 8.25,8.175 r90 top
C85A "18pF" CAPC1608X87N 62.718,86.918 r0 top (schematic designator C85)
C85B "18pF" CAPC1608X87N 62.718,76.918 r0 top (schematic designator C85)
C85C "18pF" CAPC1608X87N 62.731,66.874 r0 top (schematic designator C85)
C85D "18pF" CAPC1608X87N 62.718,56.918 r0 top (schematic designator C85)
C85E "18pF" CAPC1608X87N 62.718,46.918 r0 top (schematic designator C85)
C85F "18pF" CAPC1608X87N 62.718,36.918 r0 top (schematic designator C85)
C85G "18pF" CAPC1608X87N 62.718,26.918 r0 top (schematic designator C85)
C85H "18pF" CAPC1608X87N 62.718,16.918 r0 top (schematic designator C85)
C88A "18pF" CAPC1608X87N 62.718,85.14 r0 top (schematic designator C88)
C88B "18pF" CAPC1608X87N 62.718,75.14 r0 top (schematic designator C88)
C88C "18pF" CAPC1608X87N 62.731,65.096 r0 top (schematic designator C88)
C88D "18pF" CAPC1608X87N 62.718,55.14 r0 top (schematic designator C88)
C88E "18pF" CAPC1608X87N 62.718,45.14 r0 top (schematic designator C88)
C88F "18pF" CAPC1608X87N 62.718,35.14 r0 top (schematic designator C88)
C88G "18pF" CAPC1608X87N 62.718,25.14 r0 top (schematic designator C88)
C88H "18pF" CAPC1608X87N 62.718,15.14 r0 top (schematic designator C88)
C94 "100nF" CAPC1608X87N 97.513,84.456 r90 top
C112 "1uF" CAPC1608X87N 123,55.25 r180 top
C114 "10nF" CAPC1608X87N 111.25,32.75 r0 top
C115 "10uF" CAPMP3216X180N 112,34.75 r180 top
C116 "10nF" CAPC1608X87N 122.5,46.5 r0 top
C117 "1uF" CAPC1608X87N 122.5,44.5 r180 top
C118 "10uF" CAPMP3216X180N 112.5,44.5 r180 top
C120 "100nF" CAPC1005X55N 145.871,62.524 r90 top
C121 "22uF" CAPC2012X135N 143.407,62.498 r0 top
C122 "100nF" CAPC1005X55N 139.5,69.25 r180 top
C123 "22uF" CAPC2012X135N 137.768,68.036 r270 top
C153 "100nF" CAPC1005X55N 109.925,15.75 r180 top
C154 "100nF" CAPC1005X55N 144.675,37.05 r270 top
C156 "100nF" CAPC1005X55N 146.927,13.225 r180 top
C157 "100nF" CAPC1005X55N 145.114,19.743 r270 top
C158 "100nF" CAPC1005X55N 144.925,24.1 r270 top
C159 "100nF" CAPC1005X55N 144.625,28.1 r270 top
C160 "100nF" CAPC1005X55N 128.873,43.87 r270 top
C161 "100nF" CAPC1005X55N 145.993,48.007 r0 top
C162 "100nF" CAPC1005X55N 149.414,6.009 r90 top
CLIP1 "S1411-46R" CLIP_HOLLAND-SHIELDING_LC 124,94 r180 top
CLIP2 "S1411-46R" CLIP_HOLLAND-SHIELDING_LC 124,59 r180 top
CLIP3 "S1411-46R" CLIP_HOLLAND-SHIELDING_LC 149,59 r180 top
CLIP4 "S1411-46R" CLIP_HOLLAND-SHIELDING_LC 157,66 r90 top
CLIP5 "S1411-46R" CLIP_HOLLAND-SHIELDING_LC 157,86 r90 top
CLIP6 "S1411-46R" CLIP_HOLLAND-SHIELDING_LC 31,85 r90 top
CLIP7 "S1411-46R" CLIP_HOLLAND-SHIELDING_LC 31,16 r90 top
CLIP8 "S1411-46R" CLIP_HOLLAND-SHIELDING_LC 148,94 r180 top
CLIP9 "S1411-46R" CLIP_HOLLAND-SHIELDING_LC 117,85 r90 top
CLIP10 "S1411-46R" CLIP_HOLLAND-SHIELDING_LC 117,66 r90 top
CLIP11 "S1411-46R" CLIP_HOLLAND-SHIELDING_LC 106,32 r90 top
CLIP12 "S1411-46R" CLIP_HOLLAND-SHIELDING_LC 106,70 r90 top
CLIP13 "S1411-46R" CLIP_HOLLAND-SHIELDING_LC 31,33 r90 top
CLIP14 "S1411-46R" CLIP_HOLLAND-SHIELDING_LC 31,52 r90 top
CLIP15 "S1411-46R" CLIP_HOLLAND-SHIELDING_LC 31,71 r90 top
CLIP16 "S1411-46R" CLIP_HOLLAND-SHIELDING_LC 50,95 r180 top
CLIP17 "S1411-46R" CLIP_HOLLAND-SHIELDING_LC 73,95 r180 top
CLIP18 "S1411-46R" CLIP_HOLLAND-SHIELDING_LC 93,95 r180 top
CLIP19 "S1411-46R" CLIP_HOLLAND-SHIELDING_LC 106,88 r90 top
CLIP20 "S1411-46R" CLIP_HOLLAND-SHIELDING_LC 106,53 r90 top
CLIP21 "S1411-46R" CLIP_HOLLAND-SHIELDING_LC 38,5 r180 top
CLIP22 "S1411-46R" CLIP_HOLLAND-SHIELDING_LC 98,5 r180 top
CLIP23 "S1411-46R" CLIP_HOLLAND-SHIELDING_LC 106,13 r90 top
CLIP24 "S1411-46R" CLIP_HOLLAND-SHIELDING_LC 81,5 r180 top
CLIP25 "S1411-46R" CLIP_HOLLAND-SHIELDING_LC 50,5 r180 top
CLIP26 "S1411-46R" CLIP_HOLLAND-SHIELDING_LC 37,95 r180 top
D1A "BAV199" SOT95P240X110-3N 65.989,86.538 r270 top (schematic designator D1)
D1B "BAV199" SOT95P240X110-3N 65.989,76.538 r270 top (schematic designator D1)
D1C "BAV199" SOT95P240X110-3N 66.002,66.494 r270 top (schematic designator D1)
D1D "BAV199" SOT95P240X110-3N 65.989,56.538 r270 top (schematic designator D1)
D1E "BAV199" SOT95P240X110-3N 65.989,46.538 r270 top (schematic designator D1)
D1F "BAV199" SOT95P240X110-3N 65.989,36.538 r270 top (schematic designator D1)
D1G "BAV199" SOT95P240X110-3N 65.989,26.538 r270 top (schematic designator D1)
D1H "BAV199" SOT95P240X110-3N 65.989,16.538 r270 top (schematic designator D1)
D2 "1N4148WS" SODFL2512X100N 123,17 r270 top
D3A "BAV199" SOT95P240X110-3N 65.989,82.626 r90 top (schematic designator D3)
D3B "BAV199" SOT95P240X110-3N 65.989,72.626 r90 top (schematic designator D3)
D3C "BAV199" SOT95P240X110-3N 66.002,62.582 r90 top (schematic designator D3)
D3D "BAV199" SOT95P240X110-3N 65.989,52.626 r90 top (schematic designator D3)
D3E "BAV199" SOT95P240X110-3N 65.989,42.626 r90 top (schematic designator D3)
D3F "BAV199" SOT95P240X110-3N 65.989,32.626 r90 top (schematic designator D3)
D3G "BAV199" SOT95P240X110-3N 65.989,22.626 r90 top (schematic designator D3)
D3H "BAV199" SOT95P240X110-3N 65.989,12.626 r90 top (schematic designator D3)
D4 "1N4148WS" SODFL2512X100N 133,68.25 r0 top
D5 "1N4148WS" SODFL2512X100N 121.25,6.5 r180 top
D6 "1N4148WS" SODFL2512X100N 123.25,51 r180 top
D8 "SMBJ12A" DIOM5336X265N 81.85,92.25 r0 top
D9 "SMBJ12A" DIOM5336X265N 73,8 r180 top
FTG17 "Use only in PCB" FIDUCIAL_TOP_C100-200 17.725,85.69 r90 top
FTG18 "Use only in PCB" FIDUCIAL_TOP_S100-200 127,18.5 r90 top
FTG19 "Use only in PCB" FIDUCIAL_TOP_S200-400 9.8,93.4 r180 bottom
FTG20 "Use only in PCB" FIDUCIAL_TOP_S100-200 147.844,15.824 r90 bottom
IC1 "LTC6655BHMS8-4.096#PBF" SOP65P490X110-8N 101.825,21.825 r90 top
IC2 "LTC2320HUKG-16#PBF" QFN50P700X800X80_HS-53M 99.17,42.535 r0 top
IC3 "CC6-1212DF-E" CC6-1212DF-E 148.25,71.25 r180 top
IC4 "LT1761ES5-BYP#TRMPBF" SOT95P280X100-5N 118.75,45.5 r180 top
IC5 "OPA2197IDGKR" SOP65P490X110-8N 100.45,62.1 r0 top
IC6A "AD8253ARMZ" SOP50P490X110-10N 71.831,84.887 r90 top (schematic designator IC6)
IC6B "AD8253ARMZ" SOP50P490X110-10N 71.831,74.887 r90 top (schematic designator IC6)
IC6C "AD8253ARMZ" SOP50P490X110-10N 71.844,64.843 r90 top (schematic designator IC6)
IC6D "AD8253ARMZ" SOP50P490X110-10N 71.831,54.887 r90 top (schematic designator IC6)
IC6E "AD8253ARMZ" SOP50P490X110-10N 71.831,44.887 r90 top (schematic designator IC6)
IC6F "AD8253ARMZ" SOP50P490X110-10N 71.831,34.887 r90 top (schematic designator IC6)
IC6G "AD8253ARMZ" SOP50P490X110-10N 71.831,24.887 r90 top (schematic designator IC6)
IC6H "AD8253ARMZ" SOP50P490X110-10N 71.831,14.887 r90 top (schematic designator IC6)
IC7 "LT1761ES5-BYP#TRMPBF" SOT95P280X100-5N 114.401,39.149 r90 top
IC8 "TPS62175DQC" SON50P200X300X80-11N-R94X250 135,63.5 r180 top
IC9 "24AA02E48T-I/OT" SOT95P280X145-5N 130.486,9.636 r90 top
IC10 "SN74LV595APWT" SOP65P640X120-16N 101.185,81.867 r90 top
IC11 "SN74LV595APWT" SOP65P640X120-16N 98.005,10.582 r0 top
IC12A "OPA2197IDGKR" SOP65P490X110-8N 86.5,84.229 r90 top (schematic designator IC12)
IC12B "OPA2197IDGKR" SOP65P490X110-8N 86.5,74.229 r90 top (schematic designator IC12)
IC12C "OPA2197IDGKR" SOP65P490X110-8N 86.513,64.185 r90 top (schematic designator IC12)
IC12D "OPA2197IDGKR" SOP65P490X110-8N 86.5,54.229 r90 top (schematic designator IC12)
IC12E "OPA2197IDGKR" SOP65P490X110-8N 86.5,44.229 r90 top (schematic designator IC12)
IC12F "OPA2197IDGKR" SOP65P490X110-8N 86.5,34.229 r90 top (schematic designator IC12)
IC12G "OPA2197IDGKR" SOP65P490X110-8N 86.5,24.229 r90 top (schematic designator IC12)
IC12H "OPA2197IDGKR" SOP65P490X110-8N 86.5,14.229 r90 top (schematic designator IC12)
IC13 "LT1763CS8#PBF" SOIC127P600X175-8N 117.649,53.349 r0 top
IC14 "LT1964ES5-SD#TRMPBF" SOT95P280X100-5N 117.25,28 r180 top
IC15 "LM393AD" SOIC127P600X175-8N 122.25,11.25 r270 top
IC16 "LT1763CS8#PBF" SOIC127P600X175-8N 118.5,33 r0 top
IC17 "SN65LVDS2DBVR" SOT95P280X145-5N 146.985,28.495 r90 top
IC18 "SN65LVDS2DBVR" SOT95P280X145-5N 147.221,24.184 r90 top
IC19 "SN65LVDS1DBVT" SOT95P280X145-5N 147.21,19.997 r90 top
IC20 "SN65LVDS2DBVR" SOT95P280X145-5N 147.344,15.824 r90 top
IC21 "FIN1101K8X" SOP50P310X90-8N 146.507,45.154 r270 top
IC22 "FIN1101K8X" SOP50P310X90-8N 131.685,43.737 r0 top
IC23 "SN65LVDS2DBVR" SOT95P280X145-5N 146.916,32.736 r90 top
IC24 "SN65LVDS2DBVR" SOT95P280X145-5N 147.003,37.16 r90 top
IC25 "FIN1101K8X" SOP50P310X90-8N 131.652,46.575 r0 top
IC26 "TPS62175DQC" SON50P200X300X80-11N-R94X250 140.552,66.895 r0 top
IC27 "FIN1101K8X" SOP50P310X90-8N 131.556,38.586 r0 top
IC28 "FIN1101K8X" SOP50P310X90-8N 131.836,35.086 r0 top
IC29 "FIN1101K8X" SOP50P310X90-8N 132.086,31.336 r0 top
IC30 "FIN1101K8X" SOP50P310X90-8N 132.086,27.336 r0 top
IC38 "PCF8574ADW" SOIC127P1030X265-16N 113.25,9.25 r90 top
IC40 "24AA02E48T-I/OT" SOT95P280X145-5N 146.914,5.759 r90 top
J1 "Header 26" 3M_N2526-6002RB 24,51 r90 top
J2 "Familly" 3M_N2530-6002RB 138.836,26.086 r270 top locked
J3 "BNC" RENHOTEC_RHT-610-0049 6,78.206 r180 top
J4 "BNC" RENHOTEC_RHT-610-0049 6,60.206 r180 top
J5 "BNC" RENHOTEC_RHT-610-0049 6,42.206 r180 top
J6 "BNC" RENHOTEC_RHT-610-0049 6,24.206 r180 top
J13 "Familly" 3M_N2530-6002RB 154.5,26.095 r270 top
L1 "10uH" IND_MURATA-PS_8400 141,55 r270 top
L2A "2x6.5mH" IND_WURTH_WE-SL2 53.066,85.694 r0 top (schematic designator L2)
L2B "2x6.5mH" IND_WURTH_WE-SL2 53.066,75.694 r0 top (schematic designator L2)
L2C "2x6.5mH" IND_WURTH_WE-SL2 53.079,65.65 r0 top (schematic designator L2)
L2D "2x6.5mH" IND_WURTH_WE-SL2 53.066,55.694 r0 top (schematic designator L2)
L2E "2x6.5mH" IND_WURTH_WE-SL2 53.066,45.694 r0 top (schematic designator L2)
L2F "2x6.5mH" IND_WURTH_WE-SL2 53.066,35.694 r0 top (schematic designator L2)
L2G "2x6.5mH" IND_WURTH_WE-SL2 53.066,25.694 r0 top (schematic designator L2)
L2H "2x6.5mH" IND_WURTH_WE-SL2 53.066,15.694 r0 top (schematic designator L2)
L3 "10uH" IND_MURATA-PS_8400 131.25,62.5 r270 top
L4 "10uH" IND_MURATA-PS_8400 131.25,54.75 r270 top
L5 "10uH" IND_MURATA-PS_8400 144.525,66.715 r270 top
L6 "10uH" IND_MURATA-PS_8400 152.25,63.5 r90 top
L10 "10uH" IND_MURATA-PS_8400 120.5,84.75 r270 top
L11 "10uH" IND_MURATA-PS_8400 120.25,74.5 r270 top
L12 "10uH" IND_MURATA-PS_8400 124.5,63.75 r270 top
L13 "10uH" IND_MURATA-PS_8400 120.5,68.25 r90 top
LD1 "Green/Green" LED_DIALIGHT_571-0122F 2.75,69.25 r0 top
LD2 "Green/Green" LED_DIALIGHT_571-0122F 2.75,51.25 r0 top
LD3 "Green/Green" LED_DIALIGHT_571-0122F 2.75,33.25 r0 top
LD4 "Green/Green" LED_DIALIGHT_571-0122F 2.75,15.25 r0 top
LD5 "Green/Green" LED_DIALIGHT_571-0122F 2.75,89.25 r0 top
R1 "0" RESC1005X40N 101.504,26.058 r90 top
R2 "1k" RESC1608X55N 119.715,21.184 r270 top
R3 "Undefined" RESC1608X55N 109,86 r270 top
R4A "49R9" RESC6331X70N 46.25,86.325 r90 top (schematic designator R4)
R4B "49R9" RESC6331X70N 46.25,76.325 r90 top (schematic designator R4)
R4C "49R9" RESC6331X70N 46.263,66.281 r90 top (schematic designator R4)
R4D "49R9" RESC6331X70N 46.25,56.325 r90 top (schematic designator R4)
R4E "49R9" RESC6331X70N 46.25,46.325 r90 top (schematic designator R4)
R4F "49R9" RESC6331X70N 46.25,36.325 r90 top (schematic designator R4)
R4G "49R9" RESC6331X70N 46.25,26.325 r90 top (schematic designator R4)
R4H "49R9" RESC6331X70N 46.25,16.325 r90 top (schematic designator R4)
R5 "10k" RESC1005X40N 14.275,94.725 r180 top
R6 "Undefined" RESC1608X55N 112,86 r270 top
R7 "Undefined" RESC1608X55N 125.5,76.5 r270 top
R8 "0" RESC1005X40N 154.25,83.5 r90 top
R9 "100" RESC1005X40N 103.75,48.25 r270 top
R10 "0" RESC1005X40N 101.5,51.5 r0 top
R11 "82k" RESC1608X55N 102.95,36.075 r90 top
R12 "10k" RESC1005X40N 15.7,94.275 r270 top
R13 "10k" RESC1005X40N 19.5,94.275 r270 top
R14A "51" RESC1005X40N 89.159,83.076 r90 top (schematic designator R14)
R14B "51" RESC1005X40N 89.159,73.076 r90 top (schematic designator R14)
R14C "51" RESC1005X40N 89.172,63.032 r90 top (schematic designator R14)
R14D "51" RESC1005X40N 89.159,53.076 r90 top (schematic designator R14)
R14E "51" RESC1005X40N 89.159,43.076 r90 top (schematic designator R14)
R14F "51" RESC1005X40N 89.159,33.076 r90 top (schematic designator R14)
R14G "51" RESC1005X40N 89.159,23.076 r90 top (schematic designator R14)
R14H "51" RESC1005X40N 89.159,13.076 r90 top (schematic designator R14)
R15 "0" RESC1005X40N 102.038,18.133 r180 top
R16A "51" RESC1005X40N 89.159,87.326 r270 top (schematic designator R16)
R16B "51" RESC1005X40N 89.159,77.326 r270 top (schematic designator R16)
R16C "51" RESC1005X40N 89.172,67.282 r270 top (schematic designator R16)
R16D "51" RESC1005X40N 89.159,57.326 r270 top (schematic designator R16)
R16E "51" RESC1005X40N 89.159,47.326 r270 top (schematic designator R16)
R16F "51" RESC1005X40N 89.159,37.326 r270 top (schematic designator R16)
R16G "51" RESC1005X40N 89.159,27.326 r270 top (schematic designator R16)
R16H "51" RESC1005X40N 89.159,17.326 r270 top (schematic designator R16)
R17 "100" RESC1005X40N 131.318,40.274 r0 top
R18 "2k7" RESC1608X55N 123.575,24.2 r0 top
R19 "36k" RESC1608X55N 125.25,80 r270 top
R20 "270k" RESC1608X55N 141,62.25 r270 top
R21 "82k" RESC1608X55N 139.5,63.5 r90 top
R22 "10k" RESC1005X40N 121.25,17 r270 top
R23 "2k4" RESC1005X40N 124.5,17 r90 top
R24 "33k" RESC1005X40N 137.75,64 r0 top
R25 "62k" RESC1005X40N 113.25,32.5 r270 top
R26 "24k" RESC1608X55N 115.75,45.5 r270 top
R27 "5k1" RESC1005X40N 117.7,48 r180 top
R28 "5k1" RESC1005X40N 137.75,65 r180 top
R29 "20k" RESC1005X40N 114.25,32.5 r90 top
R30 "100" RESC1005X40N 148.408,45.304 r270 top
R31 "100" RESC1005X40N 149.516,32.587 r270 top
R32 "24k" RESC1608X55N 114.25,28 r270 top
R33A "0" RESC1608X55N 58.908,87.68 r90 top (schematic designator R33)
R33B "0" RESC1608X55N 58.908,77.68 r90 top (schematic designator R33)
R33C "0" RESC1608X55N 58.921,67.636 r90 top (schematic designator R33)
R33D "0" RESC1608X55N 58.908,57.68 r90 top (schematic designator R33)
R33E "0" RESC1608X55N 58.908,47.68 r90 top (schematic designator R33)
R33F "0" RESC1608X55N 58.908,37.68 r90 top (schematic designator R33)
R33G "0" RESC1608X55N 58.908,27.68 r90 top (schematic designator R33)
R33H "0" RESC1608X55N 58.908,17.68 r90 top (schematic designator R33)
R34A "1k8" RESC1608X55N 62.718,88.442 r0 top (schematic designator R34)
R34B "1k8" RESC1608X55N 62.718,78.442 r0 top (schematic designator R34)
R34C "1k8" RESC1608X55N 62.731,68.398 r0 top (schematic designator R34)
R34D "1k8" RESC1608X55N 62.718,58.442 r0 top (schematic designator R34)
R34E "1k8" RESC1608X55N 62.718,48.442 r0 top (schematic designator R34)
R34F "1k8" RESC1608X55N 62.718,38.442 r0 top (schematic designator R34)
R34G "1k8" RESC1608X55N 62.718,28.442 r0 top (schematic designator R34)
R34H "1k8" RESC1608X55N 62.718,18.442 r0 top (schematic designator R34)
R35A "100k" RESC1608X55N 60.432,87.68 r90 top (schematic designator R35)
R35B "100k" RESC1608X55N 60.432,77.68 r90 top (schematic designator R35)
R35C "100k" RESC1608X55N 60.445,67.636 r90 top (schematic designator R35)
R35D "100k" RESC1608X55N 60.432,57.68 r90 top (schematic designator R35)
R35E "100k" RESC1608X55N 60.432,47.68 r90 top (schematic designator R35)
R35F "100k" RESC1608X55N 60.432,37.68 r90 top (schematic designator R35)
R35G "100k" RESC1608X55N 60.432,27.68 r90 top (schematic designator R35)
R35H "100k" RESC1608X55N 60.432,17.68 r90 top (schematic designator R35)
R36 "100" RESC1005X40N 149.584,28.596 r270 top
R37A "Undefined" RESC1608X55N 53.32,83.408 r0 top (schematic designator R37)
R37B "Undefined" RESC1608X55N 53.32,73.408 r0 top (schematic designator R37)
R37C "Undefined" RESC1608X55N 53.333,63.364 r0 top (schematic designator R37)
R37D "Undefined" RESC1608X55N 53.32,53.408 r0 top (schematic designator R37)
R37E "Undefined" RESC1608X55N 53.32,43.408 r0 top (schematic designator R37)
R37F "Undefined" RESC1608X55N 53.32,33.408 r0 top (schematic designator R37)
R37G "Undefined" RESC1608X55N 53.32,23.408 r0 top (schematic designator R37)
R37H "Undefined" RESC1608X55N 53.32,13.408 r0 top (schematic designator R37)
R38 "2k7" RESC1608X55N 112,28.75 r0 top
R39 "100" RESC1005X40N 149.571,24.034 r270 top
R40 "100" RESC1005X40N 149.5,15.95 r270 top
R41A "0" RESC1608X55N 58.908,84.632 r270 top (schematic designator R41)
R41B "0" RESC1608X55N 58.908,74.632 r270 top (schematic designator R41)
R41C "0" RESC1608X55N 58.921,64.588 r270 top (schematic designator R41)
R41D "0" RESC1608X55N 58.908,54.632 r270 top (schematic designator R41)
R41E "0" RESC1608X55N 58.908,44.632 r270 top (schematic designator R41)
R41F "0" RESC1608X55N 58.908,34.632 r270 top (schematic designator R41)
R41G "0" RESC1608X55N 58.908,24.632 r270 top (schematic designator R41)
R41H "0" RESC1608X55N 58.908,14.632 r270 top (schematic designator R41)
R42A "1k8" RESC1608X55N 62.718,83.616 r0 top (schematic designator R42)
R42B "1k8" RESC1608X55N 62.718,73.616 r0 top (schematic designator R42)
R42C "1k8" RESC1608X55N 62.731,63.572 r0 top (schematic designator R42)
R42D "1k8" RESC1608X55N 62.718,53.616 r0 top (schematic designator R42)
R42E "1k8" RESC1608X55N 62.718,43.616 r0 top (schematic designator R42)
R42F "1k8" RESC1608X55N 62.718,33.616 r0 top (schematic designator R42)
R42G "1k8" RESC1608X55N 62.718,23.616 r0 top (schematic designator R42)
R42H "1k8" RESC1608X55N 62.718,13.616 r0 top (schematic designator R42)
R43A "100k" RESC1608X55N 60.432,84.632 r270 top (schematic designator R43)
R43B "100k" RESC1608X55N 60.432,74.632 r270 top (schematic designator R43)
R43C "100k" RESC1608X55N 60.445,64.588 r270 top (schematic designator R43)
R43D "100k" RESC1608X55N 60.432,54.632 r270 top (schematic designator R43)
R43E "100k" RESC1608X55N 60.432,44.632 r270 top (schematic designator R43)
R43F "100k" RESC1608X55N 60.432,34.632 r270 top (schematic designator R43)
R43G "100k" RESC1608X55N 60.432,24.632 r270 top (schematic designator R43)
R43H "100k" RESC1608X55N 60.432,14.632 r270 top (schematic designator R43)
R44 "100" RESC1005X40N 131.656,48.365 r0 top
R45 "100" RESC1005X40N 131.649,36.871 r0 top
R46 "100" RESC1005X40N 132.052,33.11 r0 top
R47 "100" RESC1005X40N 132.128,29.121 r0 top
R48 "62k" RESC1005X40N 119,14.25 r90 top
R49 "10k" RESC1005X40N 23.45,94.325 r270 top
R50A "2k4" RESC1005X40N 89,89.325 r180 top (schematic designator R50)
R50B "2k4" RESC1005X40N 89,79.325 r180 top (schematic designator R50)
R50C "2k4" RESC1005X40N 89.013,69.281 r180 top (schematic designator R50)
R50D "2k4" RESC1005X40N 89,59.325 r180 top (schematic designator R50)
R50E "2k4" RESC1005X40N 89,49.325 r180 top (schematic designator R50)
R50F "2k4" RESC1005X40N 89,39.325 r180 top (schematic designator R50)
R50G "2k4" RESC1005X40N 89,29.325 r180 top (schematic designator R50)
R50H "2k4" RESC1005X40N 89,19.325 r180 top (schematic designator R50)
R51 "5k1" RESC1005X40N 123.5,6.5 r90 top
R52 "24k" RESC1608X55N 125.75,11.25 r90 top
R53 "51k" RESC1005X40N 113.75,41.75 r180 top
R54 "47k" RESC1005X40N 115.75,41.75 r180 top
R55 "100" RESC1005X40N 149.352,37.261 r270 top
R56 "24k" RESC1608X55N 132.85,66.275 r180 top
R57 "5k1" RESC1005X40N 141.5,64.5 r180 top
R58 "220" RESC1608X55N 12.75,88.25 r90 top
R59 "220" RESC1608X55N 15,88.5 r0 top
R60 "220" RESC1608X55N 18.25,88.4 r0 top
R61 "220" RESC1608X55N 22.5,88.4 r0 top
R62 "220" RESC1608X55N 18.25,15.25 r270 top
R63 "220" RESC1608X55N 22,15.25 r270 top
R64 "220" RESC1608X55N 7.25,12.5 r0 top
R65 "220" RESC1608X55N 14,14.75 r0 top
R66 "220" RESC1608X55N 18.25,96 r0 top
R67 "220" RESC1608X55N 15.25,96 r0 top
R68 "10k" RESC1005X40N 17.325,8.75 r90 top
R69 "10k" RESC1005X40N 20.75,8.725 r90 top
R70 "10k" RESC1005X40N 9.675,8.4 r90 top
R71 "10k" RESC1005X40N 13.9,8.725 r90 top
R72 "24k" RESC1608X55N 100.5,72.35 r180 top
R73A "24k" RESC1608X55N 81.25,89 r180 top (schematic designator R73)
R73B "24k" RESC1608X55N 81.225,79.025 r180 top (schematic designator R73)
R73C "24k" RESC1608X55N 81.25,68.975 r180 top (schematic designator R73)
R73D "24k" RESC1608X55N 81.25,58.925 r180 top (schematic designator R73)
R73E "24k" RESC1608X55N 81.25,49 r180 top (schematic designator R73)
R73F "24k" RESC1608X55N 81.225,39.025 r180 top (schematic designator R73)
R73G "24k" RESC1608X55N 81.25,29 r180 top (schematic designator R73)
R73H "24k" RESC1608X55N 81.225,19 r180 top (schematic designator R73)
R74 "Undefined" RESC1608X55N 109.8,89.1 r0 top
R75 "0" RESC1608X55N 8.225,92.122 r180 top
R76 "0" RESC1608X55N 9.352,5.625 r180 top
R86A "Undefined" RESC1608X55N 53.32,87.98 r0 top (schematic designator R86)
R86B "Undefined" RESC1608X55N 53.32,77.98 r0 top (schematic designator R86)
R86C "Undefined" RESC1608X55N 53.333,67.936 r0 top (schematic designator R86)
R86D "Undefined" RESC1608X55N 53.32,57.98 r0 top (schematic designator R86)
R86E "Undefined" RESC1608X55N 53.32,47.98 r0 top (schematic designator R86)
R86F "Undefined" RESC1608X55N 53.32,37.98 r0 top (schematic designator R86)
R86G "Undefined" RESC1608X55N 53.32,27.98 r0 top (schematic designator R86)
R86H "Undefined" RESC1608X55N 53.32,17.98 r0 top (schematic designator R86)
R142 "24k" RESC1608X55N 112.25,54 r180 top
R143 "2k7" RESC1608X55N 112.25,55.5 r0 top
RN1A "10k 5K 5K 10K" SOIC127P600X175-8N 76.479,84.277 r90 top (schematic designator RN1)
RN1B "10k 5K 5K 10K" SOIC127P600X175-8N 76.479,74.277 r90 top (schematic designator RN1)
RN1C "10k 5K 5K 10K" SOIC127P600X175-8N 76.492,64.233 r90 top (schematic designator RN1)
RN1D "10k 5K 5K 10K" SOIC127P600X175-8N 76.479,54.277 r90 top (schematic designator RN1)
RN1E "10k 5K 5K 10K" SOIC127P600X175-8N 76.479,44.277 r90 top (schematic designator RN1)
RN1F "10k 5K 5K 10K" SOIC127P600X175-8N 76.479,34.277 r90 top (schematic designator RN1)
RN1G "10k 5K 5K 10K" SOIC127P600X175-8N 76.479,24.277 r90 top (schematic designator RN1)
RN1H "10k 5K 5K 10K" SOIC127P600X175-8N 76.479,14.277 r90 top (schematic designator RN1)
RN2A "10k 5K 5K 10K" SOIC127P600X175-8N 81.985,84.275 r270 top (schematic designator RN2)
RN2B "10k 5K 5K 10K" SOIC127P600X175-8N 81.985,74.275 r270 top (schematic designator RN2)
RN2C "10k 5K 5K 10K" SOIC127P600X175-8N 81.998,64.232 r270 top (schematic designator RN2)
RN2D "10k 5K 5K 10K" SOIC127P600X175-8N 81.985,54.275 r270 top (schematic designator RN2)
RN2E "10k 5K 5K 10K" SOIC127P600X175-8N 81.985,44.275 r270 top (schematic designator RN2)
RN2F "10k 5K 5K 10K" SOIC127P600X175-8N 81.985,34.275 r270 top (schematic designator RN2)
RN2G "10k 5K 5K 10K" SOIC127P600X175-8N 81.985,24.275 r270 top (schematic designator RN2)
RN2H "10k 5K 5K 10K" SOIC127P600X175-8N 81.985,14.275 r270 top (schematic designator RN2)
RN3 "10k 5K 5K 10K" SOIC127P600X175-8N 100.575,57.375 r180 top
RN4 "10k 5K 5K 10K" SOIC127P600X175-8N 100.4,66.925 r180 top
SW1A "Switch" SW_CTS_204-121ST 38.842,85.44 r270 top (schematic designator SW1)
SW1B "Switch" SW_CTS_204-121ST 38.842,75.44 r270 top (schematic designator SW1)
SW1C "Switch" SW_CTS_204-121ST 38.855,65.396 r270 top (schematic designator SW1)
SW1D "Switch" SW_CTS_204-121ST 38.842,55.44 r270 top (schematic designator SW1)
SW1E "Switch" SW_CTS_204-121ST 38.842,45.44 r270 top (schematic designator SW1)
SW1F "Switch" SW_CTS_204-121ST 38.842,35.44 r270 top (schematic designator SW1)
SW1G "Switch" SW_CTS_204-121ST 38.842,25.44 r270 top (schematic designator SW1)
SW1H "Switch" SW_CTS_204-121ST 38.842,15.44 r270 top (schematic designator SW1)
T1 "BSS138LT1G" SOT95P240X110-3N 11.25,92.75 r270 top
T2 "BSS138LT1G" SOT95P240X110-3N 14.75,91.25 r270 top
T3 "BSS138LT1G" SOT95P240X110-3N 18.5,91.15 r270 top
T4 "BSS138LT1G" SOT95P240X110-3N 22.5,91.15 r270 top
T5 "BSS138LT1G" SOT95P240X110-3N 18.25,11.75 r90 top
T6 "BSS138LT1G" SOT95P240X110-3N 22,11.75 r90 top
T7 "BSS138LT1G" SOT95P240X110-3N 10.75,11.5 r90 top
T8 "BSS138LT1G" SOT95P240X110-3N 14.75,11.75 r90 top
T9 "BSS138LT1G" SOT95P240X110-3N 122.535,21.387 r180 top
TP1 "Test Point" TPS127 147.031,11.595 r0 top
TP2 "Test Point" TPS127 147.056,9.537 r0 top
TP3 "Test Point" TPS127 131.486,5.386 r0 top
TP4 "Test Point" TPS127 129.486,5.386 r0 top
TP5 "Test Point" TPS127 133.261,10.961 r0 top
TP6 "Test Point" TPS127 130.225,14.35 r0 top
TP7 "Test Point" TPS127 109.5,51.75 r0 top
TP8 "Test Point" TPS127 111.75,46.5 r0 top
TP9 "Test Point" TPS127 109.5,29.25 r0 top
TP10 "Test Point" TPS127 118.75,40 r90 top
TP11 "Test Point" TPS127 144.5,53.5 r90 top
TP12 "Test Point" TPS127 125.25,31.25 r90 top
TP13 "Test Point" TPS127 119.5,24 r90 top

## Footprints (in the part's own frame and the unit in brackets; to place one, negate y for a bottom-side part, rotate by r counter-clockwise, add the part's x,y. Pads: shape width x height; smd on the part's side, far side on the other; paste and mask are expansions set on the pad)
3M_N2526-6002RB [mm] "26 Contacts - Straight .100\" x .100\" Low Profile Four-Wall Header"
  round 1.6 hole 1: 1(-15.24,-1.27) 2(-15.24,1.27) 3(-12.7,-1.27) 4(-12.7,1.27) 5(-10.16,-1.27) 6(-10.16,1.27) 7(-7.62,-1.27) 8(-7.62,1.27) 9(-5.08,-1.27) 10(-5.08,1.27) 11(-2.54,-1.27) 12(-2.54,1.27) 13(0,-1.27) 14(0,1.27) 15(2.54,-1.27) 16(2.54,1.27) 17(5.08,-1.27) 18(5.08,1.27) 19(7.62,-1.27) 20(7.62,1.27) 21(10.16,-1.27) 22(10.16,1.27) 23(12.7,-1.27) 24(12.7,1.27) 25(15.24,-1.27) 26(15.24,1.27)
  silkscreen extent -20.17,-4.85 20.17,4.52, body extent -20.17,-4.11 20.17,4.52, height 9.91
3M_N2530-6002RB [mm] "30 Contacts - Straight .100\" x .100\" Low Profile Four-Wall Header"
  round 1.6 hole 1: 1(-17.78,-1.27) 2(-17.78,1.27) 3(-15.24,-1.27) 4(-15.24,1.27) 5(-12.7,-1.27) 6(-12.7,1.27) 7(-10.16,-1.27) 8(-10.16,1.27) 9(-7.62,-1.27) 10(-7.62,1.27) 11(-5.08,-1.27) 12(-5.08,1.27) 13(-2.54,-1.27) 14(-2.54,1.27) 15(0,-1.27) 16(0,1.27) 17(2.54,-1.27) 18(2.54,1.27) 19(5.08,-1.27) 20(5.08,1.27) 21(7.62,-1.27) 22(7.62,1.27) 23(10.16,-1.27) 24(10.16,1.27) 25(12.7,-1.27) 26(12.7,1.27) 27(15.24,-1.27) 28(15.24,1.27) 29(17.78,-1.27) 30(17.78,1.27)
  silkscreen extent -22.71,-4.85 22.71,4.52, body extent -22.71,-4.11 22.71,4.52, height 9.91
CAPC1005X55N [mm] "Chip Capacitor, Body 1.0x0.55mm, IPC Medium Density"
  rect 0.62x0.62 smd: 1(-0.45,0) 2(0.45,0)
  body extent -0.52,-0.27 0.53,0.28, height 0.55
CAPC1608X87N [mm] "Chip Capacitor, Body 1.6x0.8mm IPC Medium Density"
  rect 0.95x1 smd: 1(-0.8,0) 2(0.8,0)
  body extent -0.87,-0.47 0.88,0.48, height 0.87
CAPC2012X90N [mm] "Chip Capacitor, Body 2.0x1.25mm, IPC Medium Density"
  rect 1.1x1.45 smd: 1(-0.9,0) 2(0.9,0)
  silkscreen extent 0,-0.58 0,0.58, body extent -1.05,-0.67 1.05,0.68, height 0.9
CAPC2012X95N [mm] "Chip Capacitor, Body 2.0x1.25mm, IPC Medium Density"
  rect 1.1x1.45 smd: 1(-0.9,0) 2(0.9,0)
  silkscreen extent 0,-0.58 0,0.58, body extent -1.05,-0.67 1.05,0.68, height 0.95
CAPC2012X135N [mm] "Chip Capacitor, Body 2.0x1.25mm, IPC Medium Density"
  rect 1.05x1.4 smd: 1(-0.9,0) 2(0.9,0)
  silkscreen extent 0,-0.58 0,0.58, body extent -1.05,-0.67 1.05,0.68, height 1.25
CAPC2013X100N [mm] "Capacitor, Non-Polarized, Chip; 2.00mm L X 1.25mm W X 0.9mm H, IPC Medium Density"
  rect 1.15x1.45 smd: 1(-0.9,0) 2(0.9,0)
  silkscreen extent 0,-0.63 0,0.63, body extent -1.1,-0.72 1.1,0.73, height 1
CAPMP3216X180N [mm] "Capacitor, Polarized, Molded  Body 3.2x1.6mm, IPC Medium Density"
  rect 1.8x1.25 smd: 1(-1.3,0) 2(1.3,0)
  silkscreen extent -2.4,-0.7 0,1.2, body extent -1.7,-0.9 1.7,0.9, height 1.6
CC6-1212DF-E [mm]
  round 2 hole 1: 1(-2.54,-2.63) 2(-2.54,-12.79) 3(-2.54,-17.87) 4(20.32,-17.87) 5(20.32,-12.79) 6(20.32,-7.71) 7(20.32,-2.63)
  round 2.5 hole 1.5: 8(0,0) 9(17.78,-20.5)
  silkscreen extent -4.06,-20.83 20.44,0.25, body extent -2.72,-20.81 20.44,0.29, height 8.4
CLIP_HOLLAND-SHIELDING_LC [mm] "Surface Mount Clip for PCB Screening Covers"
  rect 9.4x2.3 smd: 1(0,0)
  silkscreen extent -4.7,-1.5 4.7,1.5, body extent -4.4,-1.15 4.4,1.15, height 3.5
DIOM5336X265N [mm] "DO-214-AA/SMB Diode, Molded Body; 5.34mm L X 3.625mm W X 2.65mm H, IPC Medium Density"
  rect 2.3x2.15 smd: 1(-2.15,0) 2(2.15,0)
  silkscreen extent -3.92,-1.8 2.65,1.8, body extent -2.7,-1.95 2.7,1.95, height 2.4
FIDUCIAL_TOP_C100-200 [mm] "Round Fiducial Target, Top Layer, 1.0mm, Top Solder 2.0mm, Keepout =2.0mm"
  round 1 smd paste-0.51 mask+0.5: FTG2(0,0)
  Top keep-out circle w0.1: c0,0 r1
FIDUCIAL_TOP_S100-200 [mm] "Square Fiducial Target, Top Layer, 1.0mm, Top Solder 2.0mm, Keepout =2.0mm"
  rect 1x1 smd rot 45 paste-0.51 mask+0.5: 1(0,0)
  Top keep-out region: 1.414,0 0,-1.414 -1.414,0 0,1.414
FIDUCIAL_TOP_S200-400 [mm] "Square Fiducial Target, Top Layer, 2.0mm, Top Solder 4.0mm, Keepout =4.0mm"
  rect 2x2 smd rot 45 paste-0.9 mask+1: 1(0,0)
  Top keep-out region: -2.839,0.011 -0.011,2.839 2.818,0.011 -0.011,-2.818